# Altium PCB BEE-1012 PAY-IF V1.0.0.PcbDoc (part 1 of 3)
Units mm, origin at the board's own origin, x right, y up, seen from the top; angles counter-clockwise.
Board outline 93 x 90 mm, 8 copper layers (Top Layer, GND_Plane_2, Signal_3, Power_Plane, GND_Plane_5, Signal_6, GND_Plane_7, Bottom Layer), stack 1.672 mm thick; 514 components, 368 nets, 2268 pads, 326 vias.
Unrouted connection lines stored in the file: 1343.
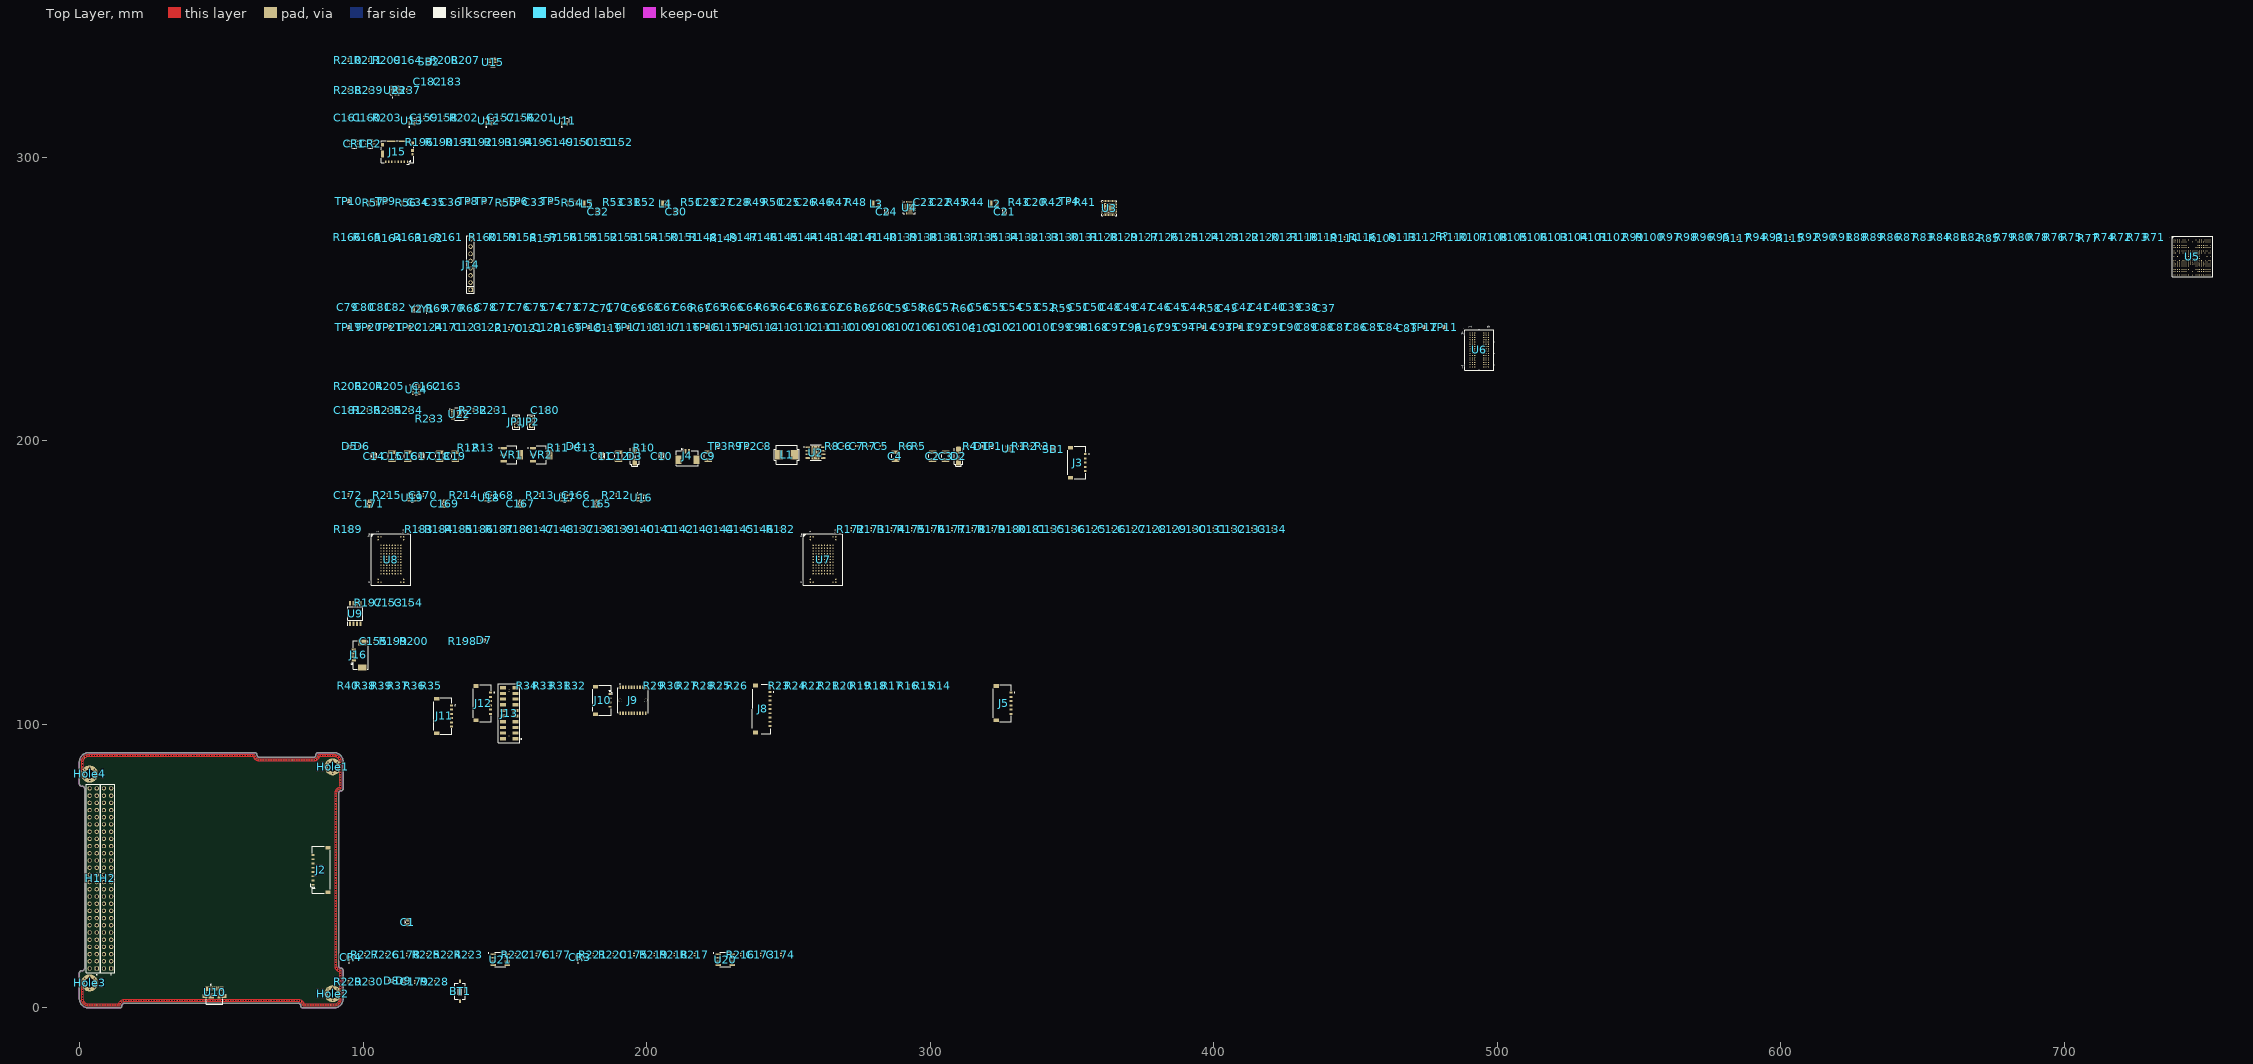
[diagram p0: Top Layer view]
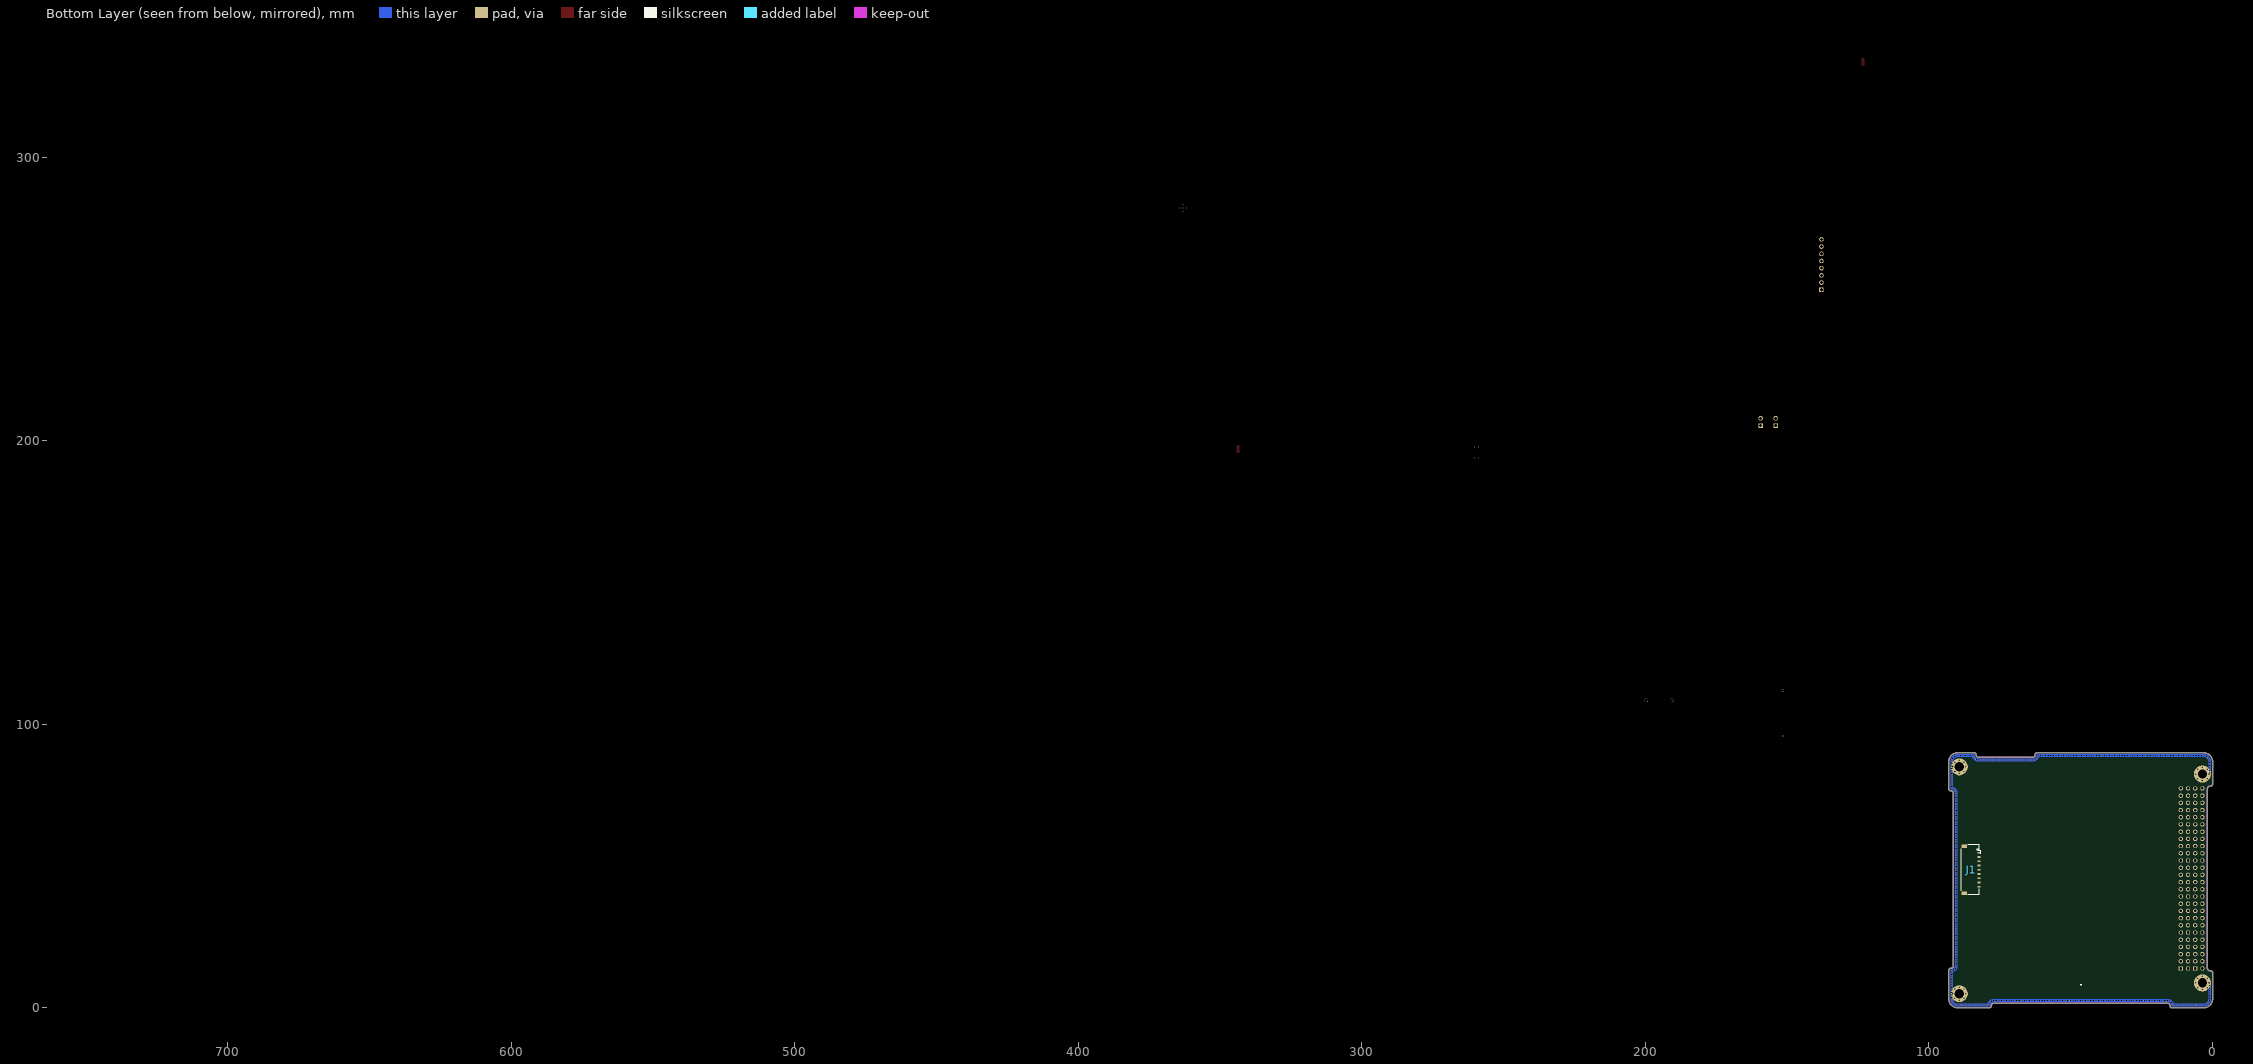
[diagram p1: Bottom Layer view, seen from below]
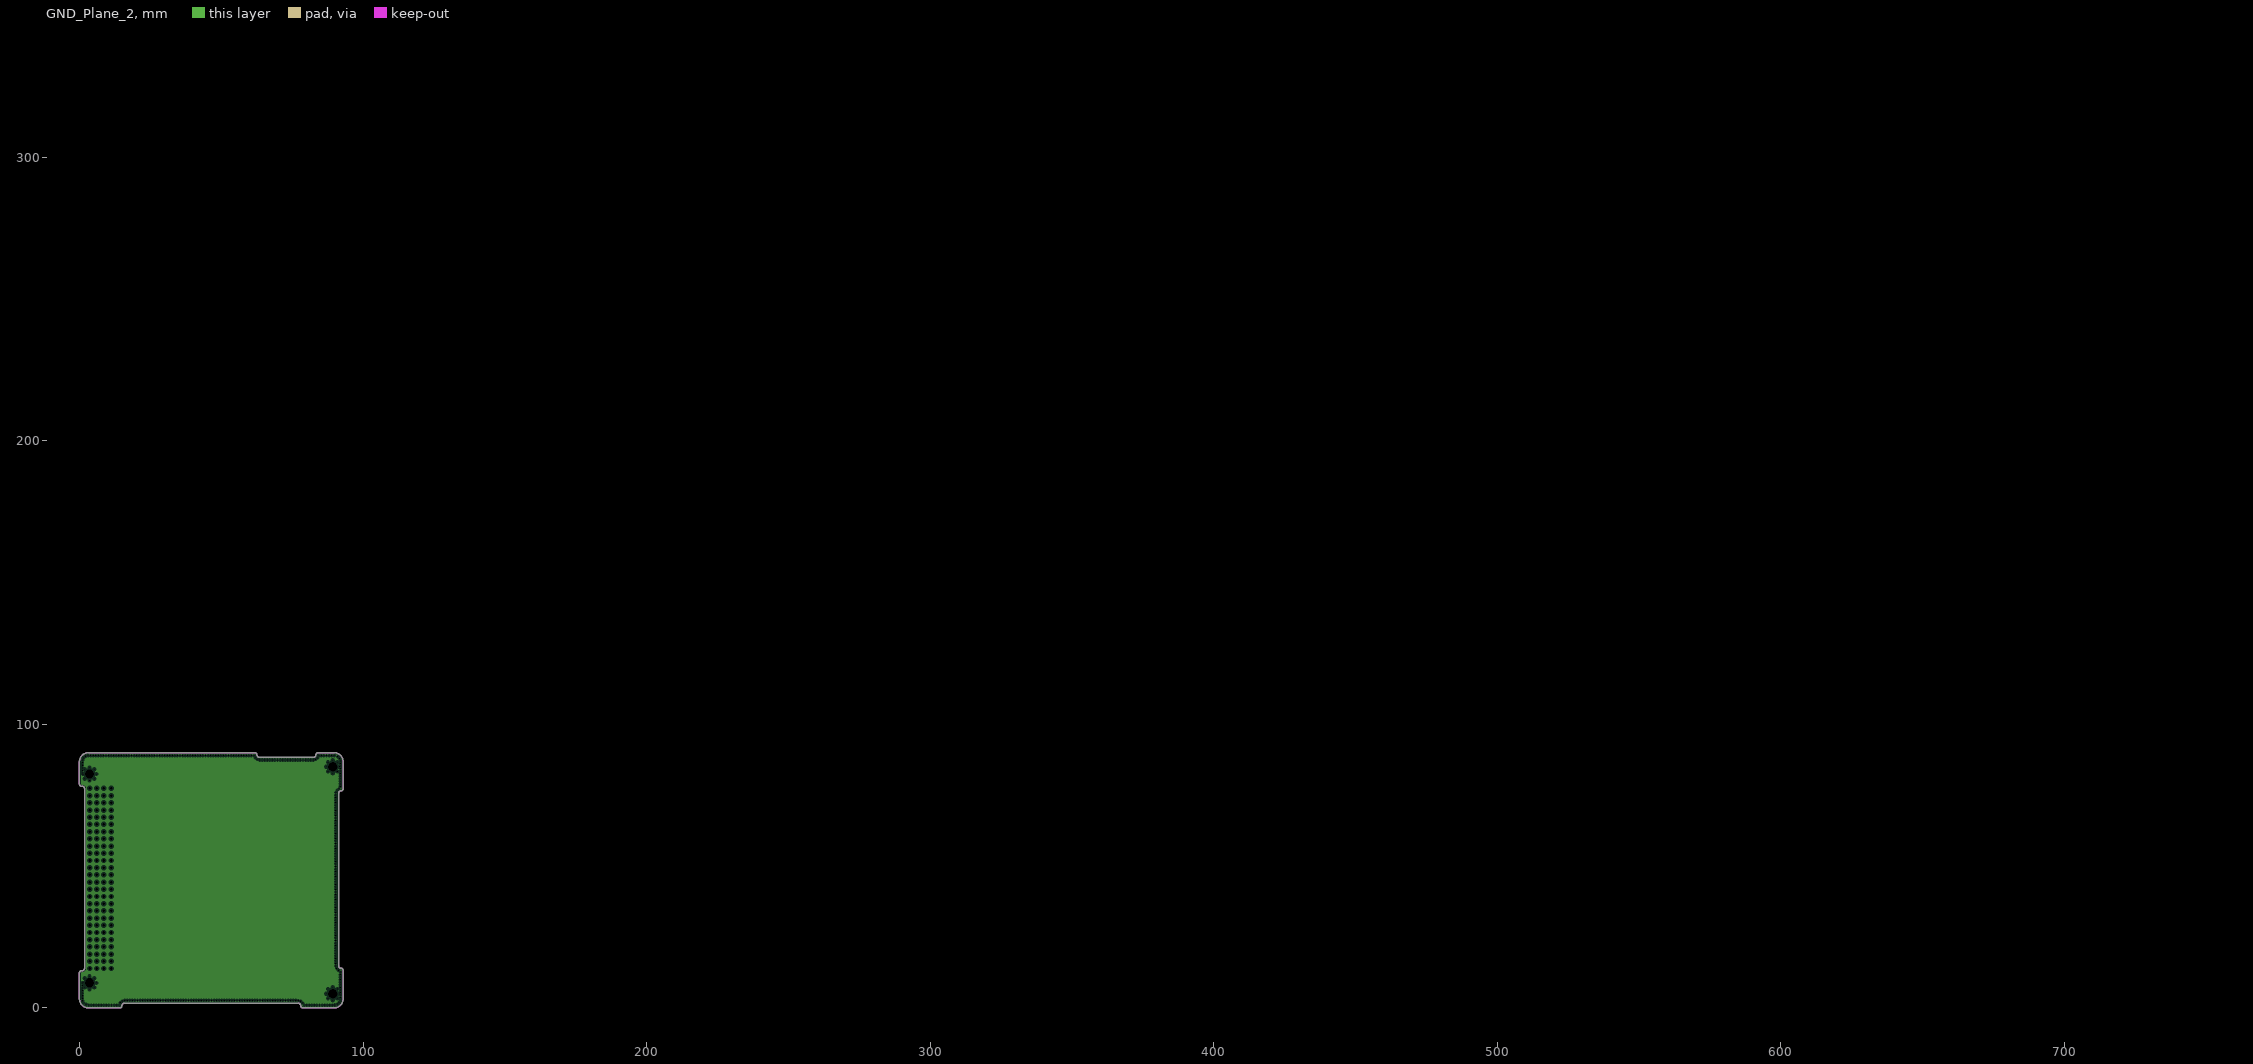
[diagram p2: GND_Plane_2, clearances drawn from the general rule]
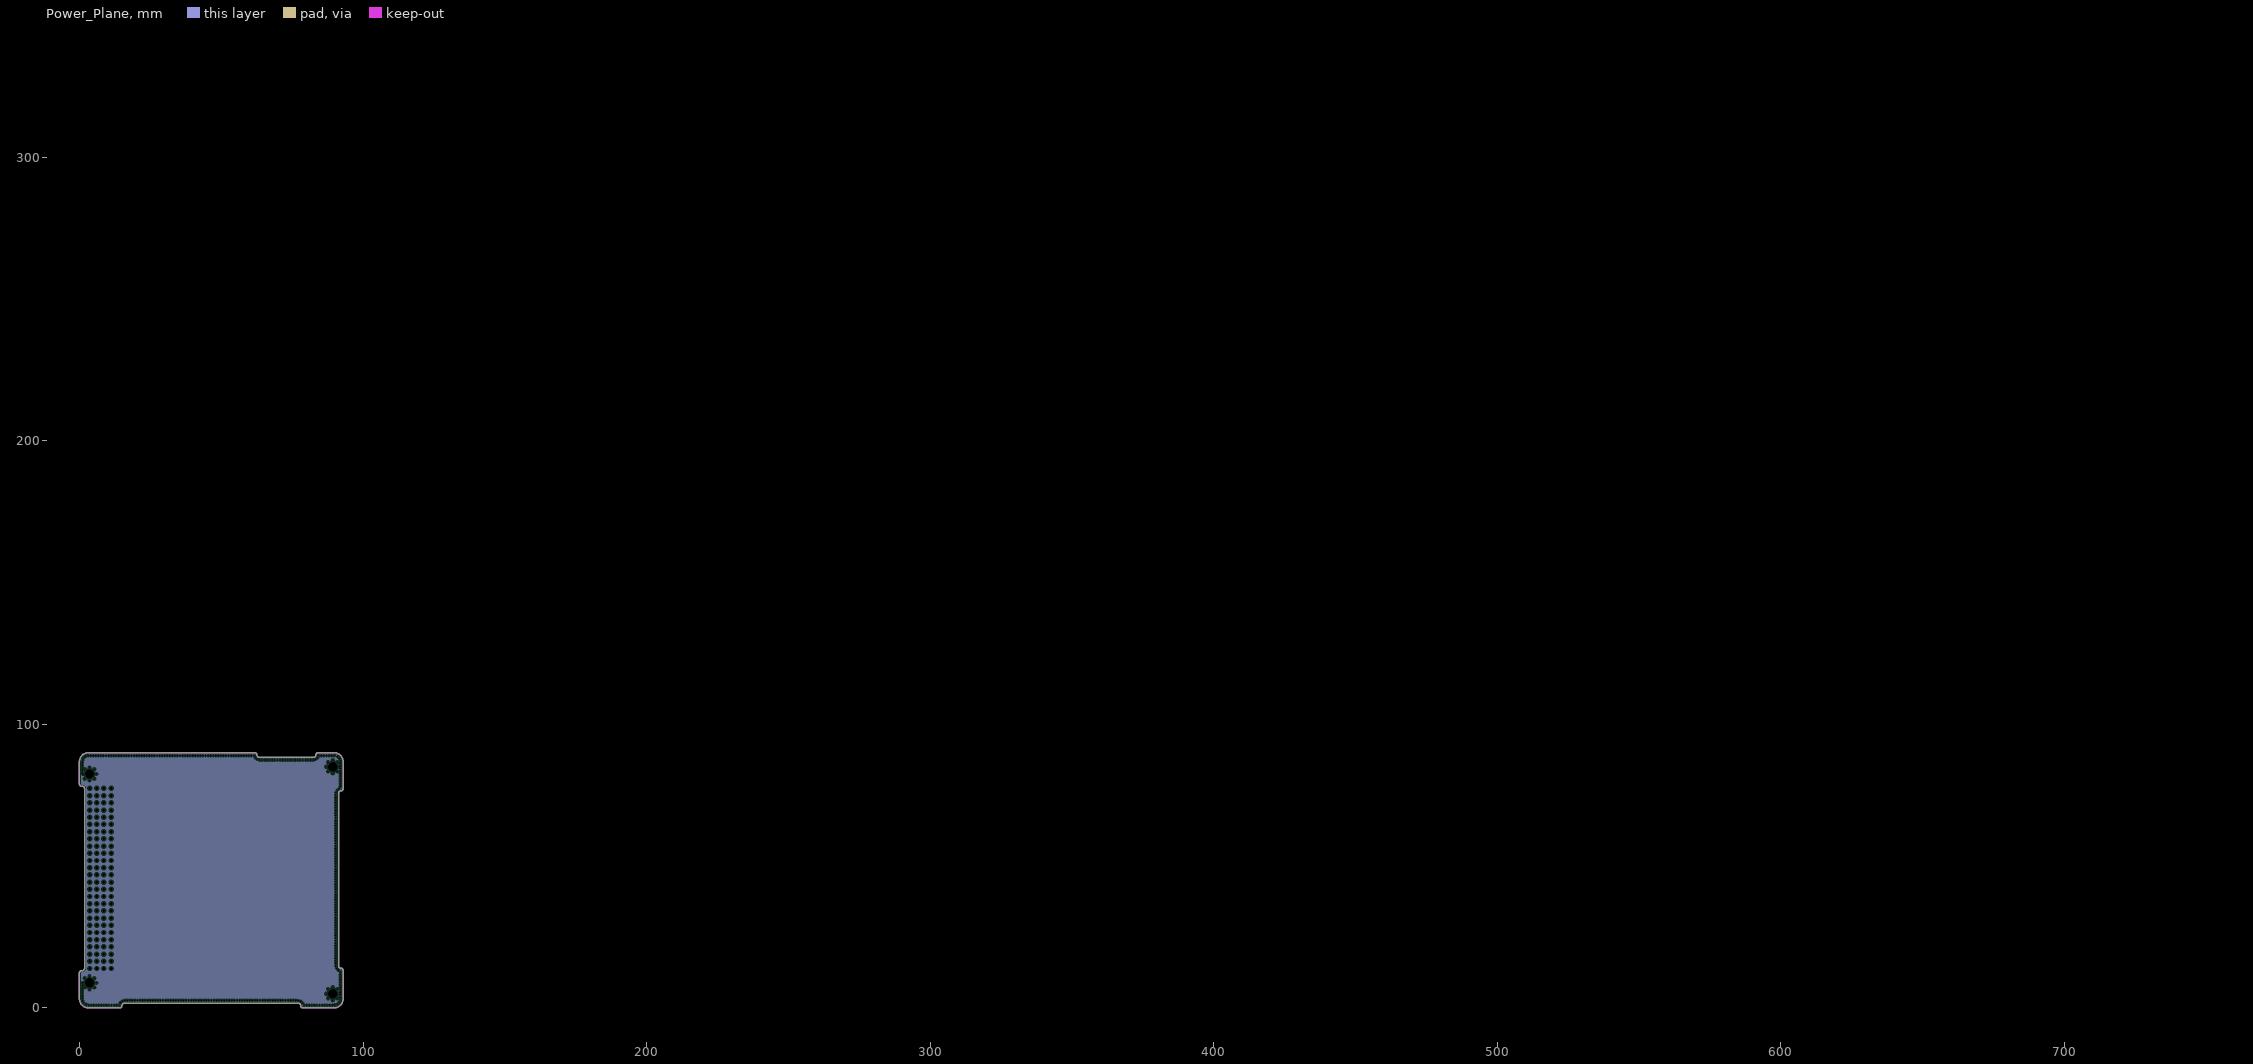
[diagram p3: Power_Plane, clearances drawn from the general rule]
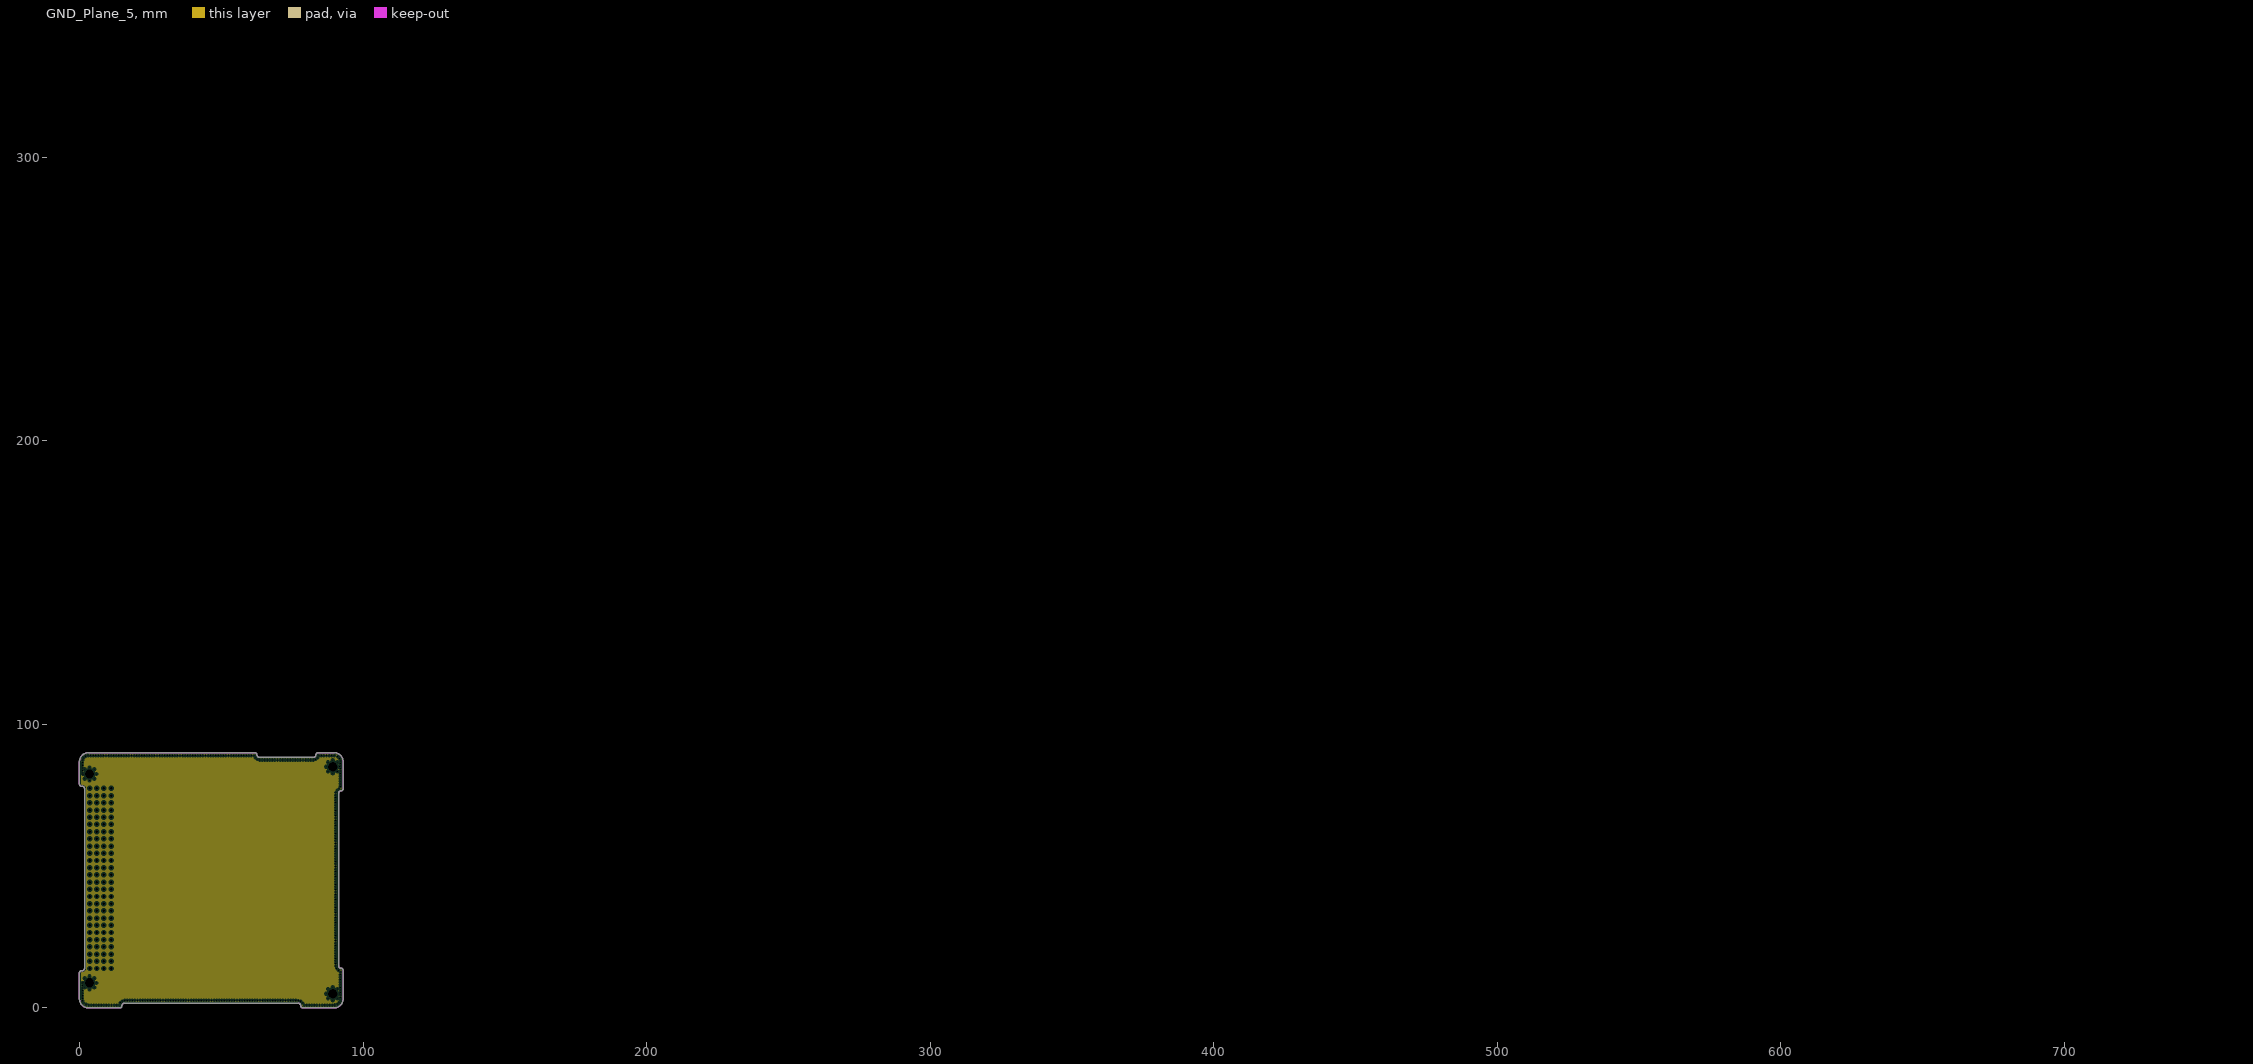
[diagram p4: GND_Plane_5, clearances drawn from the general rule]
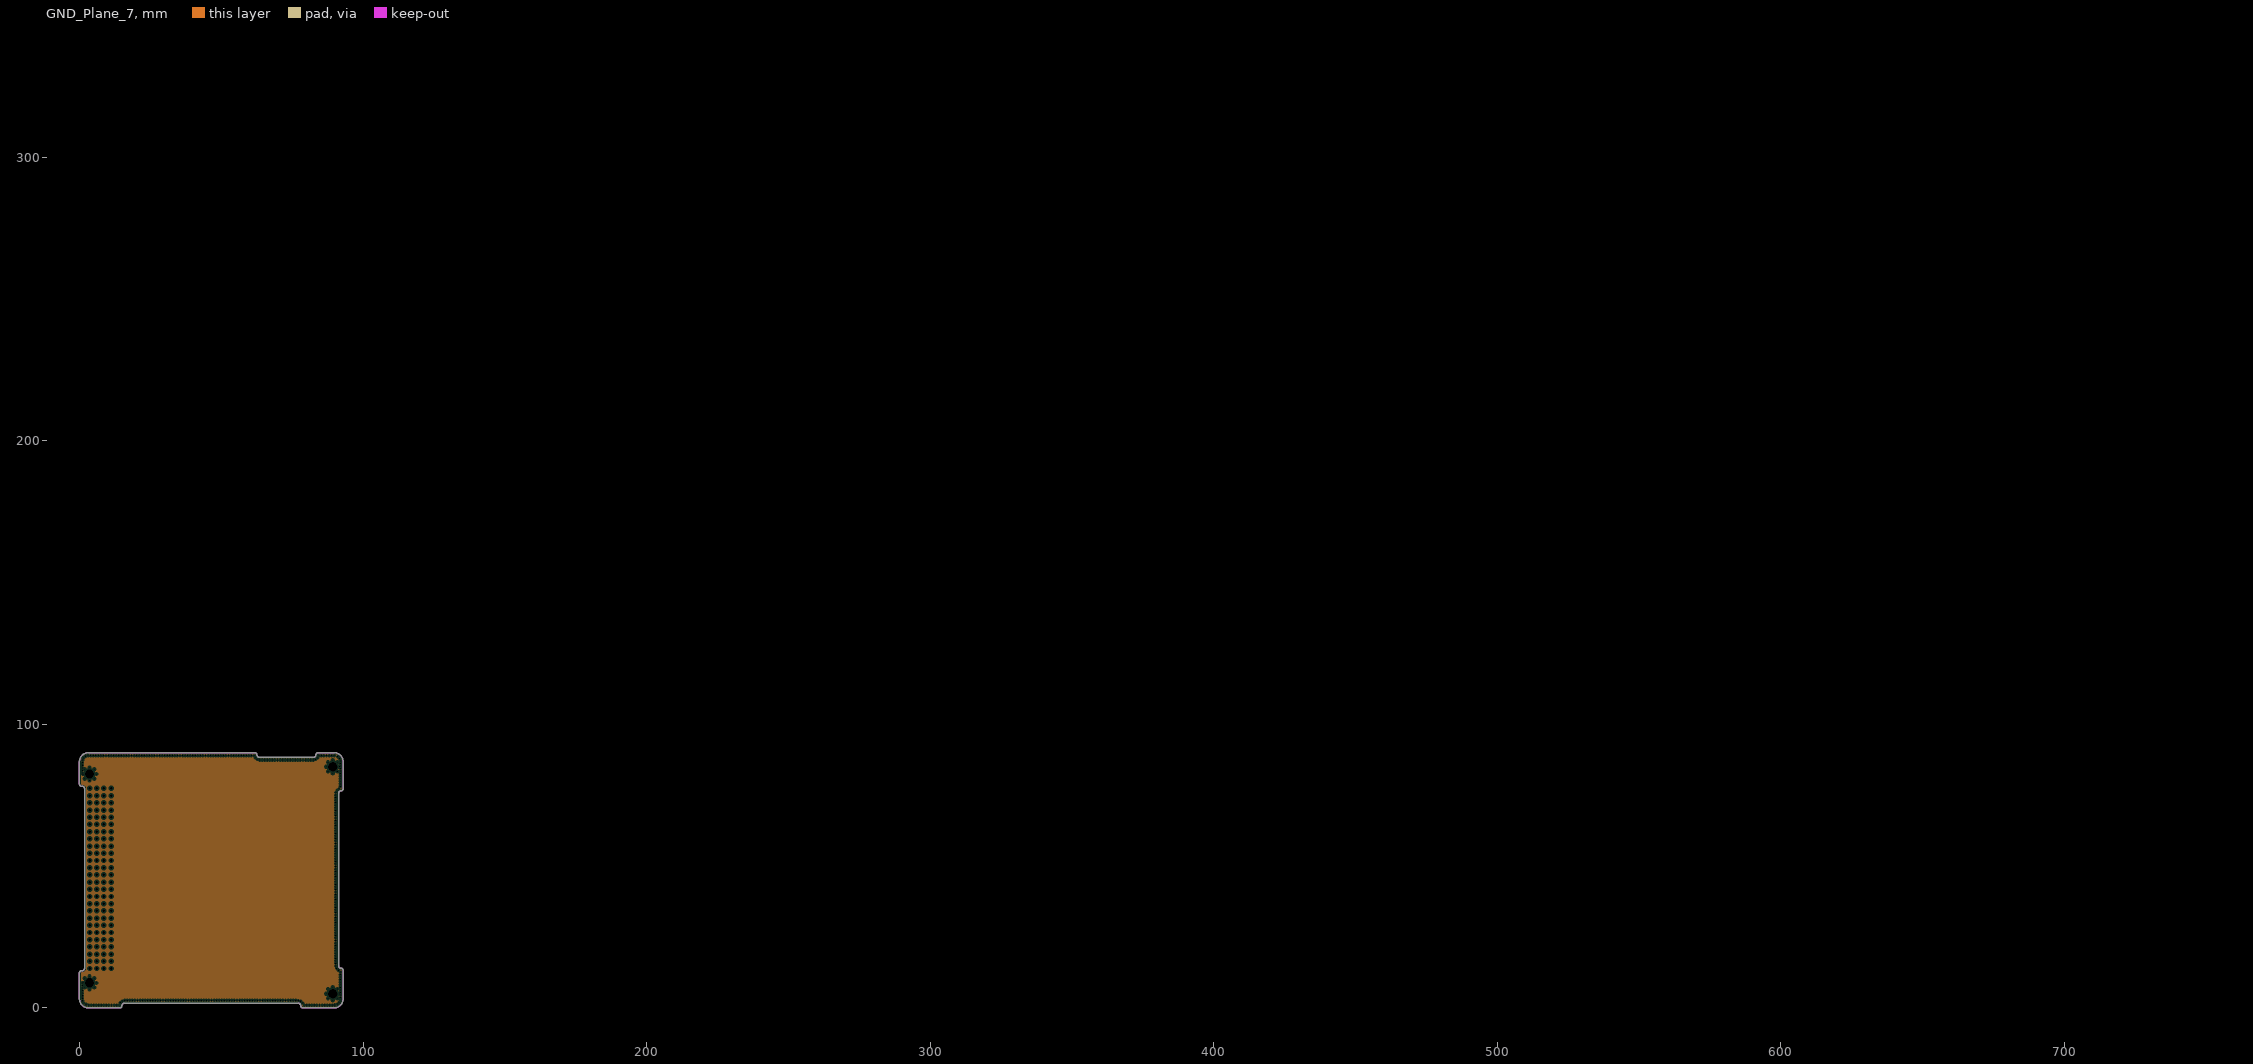
[diagram p5: GND_Plane_7, clearances drawn from the general rule]

## Layer stack, top to bottom
Top Solder: solder mask 0.012, Solder Resist, Dk 3.5
Top Layer: signal copper 0.04
Dielectric 2: prepreg 0.2, PP-006, Dk 4.1
GND_Plane_2: plane copper 0.032
Dielectric 4: prepreg 0.2, PP-006, Dk 4.1
Signal_3: signal copper 0.032
Dielectric 6: prepreg 0.2, PP-006, Dk 4.1
Power_Plane: plane copper 0.032
Dielectric 1: dielectric 0.2, FR-4, Dk 4.8
GND_Plane_5: plane copper 0.032
Dielectric 7: prepreg 0.2, PP-006, Dk 4.1
Signal_6: signal copper 0.032
Dielectric 5: prepreg 0.2, PP-006, Dk 4.1
GND_Plane_7: plane copper 0.032
Dielectric 3: prepreg 0.2, PP-006, Dk 4.1
Bottom Layer: signal copper 0.04
Bottom Solder: solder mask 0.012, Solder Resist, Dk 3.5

## Board outline
0,3.2 0,12.33 cw(c0.8,12.33) 0.8,13.13 1,13.13 ccw(c1,13.93) 1.8,13.93 1.8,77.35 ccw(c1,77.35) 1,78.15 0.8,78.15 cw(c0.8,78.95) 0,78.95 0,86.8 cw(c3.2,86.8) 3.193,90 3.2,90 61.8,90 cw(c61.8,89.2) 62.6,89.2 ccw(c63.4,89.2) 63.4,88.4 82.6,88.4 ccw(c82.6,89.2) 83.4,89.2 cw(c84.2,89.2) 84.2,90 89.8,90 89.807,90 cw(c89.8,86.8) 93,86.807 93,77.307 cw(c92.2,77.307) 92.2,76.507 ccw(c92.2,75.707) 91.4,75.707 91.4,14.8 ccw(c92.2,14.8) 92.2,14 cw(c92.2,13.2) 93,13.2 93,3.2 cw(c89.8,3.2) 89.8,0 78.8,0 cw(c78.8,0.8) 78,0.8 ccw(c77.2,0.8) 77.2,1.6 67.5,1.6 51,1.6 15.8,1.6 ccw(c15.8,0.8) 15,0.8 cw(c14.2,0.8) 14.2,0 3.2,0 cw(c3.2,3.2)

## Design rules (kind name [scope] priority, off if disabled: settings)
Clearance Clearance_BGA [WithinRoom('ROOM_SAMA7')] p1: gap=0.101 ignorepadtopadclearanceinfootprint=FALSE
Clearance Clearance_Diff90 [InNetClass('DIFF90')] p2: gap=0.127 ignorepadtopadclearanceinfootprint=FALSE
Clearance [All] p3: gap=0.127 ignorepadtopadclearanceinfootprint=FALSE
DiffPairsRouting DiffPairsRouting_Diff100 [All] p1: maxlimit=0.2 minlimit=0.127 mostfreqgap=0.2 toplayer_maxgap=0.127 toplayer_prefgap=0.127 toplayer_minwidth=0.177 toplayer_maxwidth=0.177 toplayer_prefwidth=0.177 midlayer1_mingap=0.2 midlayer1_minwidth=0.1 midlayer1_maxwidth=0.1 midlayer1_prefwidth=0.1 midlayer4_mingap=0.2 midlayer4_minwidth=0.1 midlayer4_maxwidth=0.1 midlayer4_prefwidth=0.1 bottomlayer_maxgap=0.127 bottomlayer_prefgap=0.127 bottomlayer_minwidth=0.177 bottomlayer_maxwidth=0.177 bottomlayer_prefwidth=0.177 impedanceprofiledriven=TRUE impedanceprofileid={A7C629CD-4A0D-4397-8A47-8BC4FB27C845} impedanceprofilevalue=100.000000 maxuncoupledlength=12.7
DiffPairsRouting DiffPairsRouting_Diff90 [All] p2: maxlimit=0.127 minlimit=0.127 mostfreqgap=0.127 toplayer_minwidth=0.24 toplayer_maxwidth=0.24 toplayer_prefwidth=0.24 midlayer1_minwidth=0.112 midlayer1_maxwidth=0.112 midlayer1_prefwidth=0.112 midlayer4_minwidth=0.112 midlayer4_maxwidth=0.112 midlayer4_prefwidth=0.112 bottomlayer_minwidth=0.24 bottomlayer_maxwidth=0.24 bottomlayer_prefwidth=0.24 impedanceprofiledriven=TRUE impedanceprofileid={21C5AD5F-6D0B-4350-B164-04A9B00691EE} impedanceprofilevalue=90.000000 maxuncoupledlength=12.7
MatchedLengths "Schematic Matched Net Lengths_5" [InNetClass('DDR-ADDR-CTL')] p1: tolerance=0.254 checknetsindiffpair=FALSE checkdiffpairvsdiffpair=TRUE checkxsignals=TRUE checkothers=TRUE
MatchedLengths "Schematic Matched Net Lengths_4" [InNetClass('DDR-LANE1')] p2: tolerance=0.254 checknetsindiffpair=FALSE checkdiffpairvsdiffpair=TRUE checkxsignals=TRUE checkothers=TRUE
MatchedLengths "Schematic Matched Net Lengths_3" [InNetClass('DDR-LANE0')] p3: tolerance=0.254 checknetsindiffpair=FALSE checkdiffpairvsdiffpair=TRUE checkxsignals=TRUE checkothers=TRUE
MatchedLengths "Schematic Matched Net Lengths_2" [InNetClass('DIFF90')] p4: tolerance=0.102 checknetsindiffpair=TRUE checkdiffpairvsdiffpair=FALSE checkxsignals=FALSE checkothers=FALSE
MatchedLengths "Schematic Matched Net Lengths_1" [InNetClass('DIFF100')] p5: tolerance=0.102 checknetsindiffpair=TRUE checkdiffpairvsdiffpair=FALSE checkxsignals=FALSE checkothers=FALSE
MatchedLengths "Schematic Matched Net Lengths" [InNetClass('JTAG')] p6: tolerance=2 checknetsindiffpair=FALSE checkdiffpairvsdiffpair=TRUE checkxsignals=TRUE checkothers=TRUE
PlaneClearance [All] p1: clearance=0.508
PlaneConnect [All] p1: planeconnectstyle=Relief reliefexpansion=0.508 reliefentries=4 reliefconductorwidth=0.254 reliefairgap=0.254
PolygonConnect [All] p1: connectstyle=Relief reliefconductorwidth=0.254 reliefentries=4 polygonreliefangle="90 Angle" airgapwidth=0.254
RoomDefinition ROOM_SAMA7 [False vs False] p1: confinementstyle=ConfineIn formatcopy=TRUE lockcomponents=FALSE outline 36.957,67.818 45.593,67.818 45.593,59.563 36.957,59.563
RoutingVias RoutingVias_BGA [WithinRoom('ROOM_SAMA7')] p1: holewidth=0.2 width=0.35 viastyle="Through Hole" minholewidth=0.2 minwidth=0.35 maxholewidth=0.2 maxwidth=0.35
RoutingVias [All] p2: holewidth=0.2 width=0.4 viastyle="Through Hole" minholewidth=0.2 minwidth=0.4 maxholewidth=0.5 maxwidth=1
SolderMaskExpansion [All] p1: expansion=0.102 istentingtop=FALSE
Width Width_Sing50 [InNetClass('DIFF90')] p1: maxlimit=0.364 minlimit=0.157 preferedwidth=0.364 toplayer_minwidth=0.364 midlayer1_maxwidth=0.157 midlayer1_prefwidth=0.157 midlayer4_maxwidth=0.157 midlayer4_prefwidth=0.157 bottomlayer_minwidth=0.364 impedanceprofiledriven=TRUE impedanceprofileid={9F8C7077-2CC5-4DDA-BF69-C97E8495018D} impedanceprofilevalue=50.000000 minimp=50.000000 maximp=50.000000 favimp=50.000000
Width [All] p2: maxlimit=1 minlimit=0.1 preferedwidth=0.254
27 further rules are at their usual default settings.

## Classes and differential pairs
differential pair class DIFF100: DDR_CK DDR_DQS0 DDR_DQS1
differential pair class DIFF90: EXP_USB LVDS_RXC LVDS_RXD LVDS_TXC LVDS_TXD RS_422_RX RS_422_TX SENSE1 SENSE2 SENSE3 SENSE4 USB_CONNECTOR USB_DEBUG USBA
net class QSPI: MRAM_QSPI_CLK MRAM_QSPI_CS MRAM_QSPI_D0 MRAM_QSPI_D1 MRAM_QSPI_D2 MRAM_QSPI_D3
net class JTAG: JTAG_NTRST_PC22 JTAG_TCK_PC23 JTAG_TDI_PC25 JTAG_TDO_PC26 JTAG_TMS_PC24
net class DIFF100: DDR_CK_N DDR_CK_P DDR_DQS0_N DDR_DQS0_P DDR_DQS1_N DDR_DQS1_P
net class DIFF90: EXP_USB_N EXP_USB_P USB_CONNECTOR_N USB_CONNECTOR_P USB_DEBUG_N USB_DEBUG_P USBA_N USBA_P
net class DDR-LANE1: DDR_D8 DDR_D9 DDR_D10 DDR_D11 DDR_D12 DDR_D13 DDR_D14 DDR_D15 DDR_DQM1 DDR_DQS1_N DDR_DQS1_P
net class DDR-LANE0: DDR_D0 DDR_D1 DDR_D2 DDR_D3 DDR_D4 DDR_D5 DDR_D6 DDR_D7 DDR_DQM0 DDR_DQS0_N DDR_DQS0_P
net class DDR-ADDR-CTL: DDR_A0 DDR_A1 DDR_A2 DDR_A3 DDR_A4 DDR_A5 DDR_A6 DDR_A7 DDR_A8 DDR_A9 DDR_A10 DDR_A11 DDR_A12 DDR_A13 DDR_A14 DDR_A15 DDR_BA0 DDR_BA1 DDR_BA2 DDR_CAS DDR_CK_N DDR_CK_P DDR_CKE DDR_CS DDR_ODT DDR_RAS DDR_WE
net class 50_eMMC2: SDMMC1_CLK SDMMC1_CMD SDMMC1_D0 SDMMC1_D1 SDMMC1_D2 SDMMC1_D3
net class 50_eMMC1: SDMMC0_CLK SDMMC0_CMD SDMMC0_D0 SDMMC0_D1 SDMMC0_D2 SDMMC0_D3 SDMMC0_D4 SDMMC0_D5 SDMMC0_D6 SDMMC0_D7
component class WATCHDOG: C164 R207 R208 R209 R210 R211 SB2 U15
component class USB_SWITCH: C182 C183 R237 R238 R239 U23
component class TEMP: C156 C157 C158 C159 C160 C161 R201 R202 R203 U11 U12 U13
component class SDCARD: C149 C150 C151 C152 CR1 CR2 J15 R190 R191 R192 R193 R194 R195 R196
component class SAMA7D65_PMIC: C20 C21 C22 C23 C24 C25 C26 C27 C28 C29 C30 C31 C32 C33 C34 C35 C36 L2 L3 L4 L5 R41 R42 R43 R44 R45 R46 R47 R48 R49 R50 R51 R52 R53 R54 R55 R56 R57 TP4 TP5 TP6 TP7 TP8 TP9 TP10 U3 U4
component class SAMA7D65_PIO: J14 R71 R72 R73 R74 R75 R76 R77 R78 R79 R80 R81 R82 R83 R84 R85 R86 R87 R88 R89 R90 R91 R92 R93 R94 R95 R96 R97 R98 R99 R100 R101 R102 R103 R104 R105 R106 R107 R108 R109 R110 R112 R113 R114 R115 R116 R117 R118 R119 R120 R121 R122 R123 R124 R125 R126 R127 R128 R129 R130 R131 R132 R133 R134 R135 R136 R137 R138 R139 R140 R141 R142 R143 R144 R145 R146 R147 R148 R149 R150 R151 R152 R153 R154 R155 R156 R157 R158 R159 R160 R161 R162 R163 R164 R165 R166 R? U5
component class SAMA7D65_MPU: C37 C38 C39 C40 C41 C42 C43 C44 C45 C46 C47 C48 C49 C50 C51 C52 C53 C54 C55 C56 C57 C58 C59 C60 C61 C62 C63 C64 C65 C66 C67 C68 C69 C70 C71 C72 C73 C74 C75 C76 C77 C78 C79 C80 C81 C82 R58 R59 R60 R61 R62 R63 R64 R65 R66 R67 R68 R69 R70 Y1 Y2
component class SAMA7D65_DDR3L: C83 C84 C85 C86 C87 C88 C89 C90 C91 C92 C93 C94 C95 C96 C97 C98 C99 C100 C101 C102 C103 C104 C105 C106 C107 C108 C109 C110 C111 C112 C113 C114 C115 C116 C117 C118 C119 C120 C121 C122 C123 C124 R167 R168 R169 R170 R171 TP11 TP12 TP13 TP14 TP15 TP16 TP17 TP18 TP19 TP20 TP21 TP22 U6
component class RTC: C162 C163 R204 R205 R206 U14
component class RS422: C180 C181 JP1 JP2 R231 R232 R233 R234 R235 R236 U22
component class POWER: C2 C3 C4 C5 C6 C7 C8 C9 C10 C11 C12 C13 C14 C15 C16 C17 C18 C19 D1 D2 D3 D4 D5 D6 J3 J4 L1 R1 R2 R3 R4 R5 R6 R7 R8 R9 R10 R11 R12 R13 SB1 TP1 TP2 TP3 U1 U2 VR1 VR2
component class MOUNTING_HOLE: Hole1 Hole2 Hole3 Hole4
component class LVDS: C165 C166 C167 C168 C169 C170 C171 C172 R212 R213 R214 R215 U16 U17 U18 U19
component class eMMC: C125 C126 C127 C128 C129 C130 C131 C132 C133 C134 C135 C136 C137 C138 C139 C140 C141 C142 C143 C144 C145 C146 C147 C148 R172 R173 R174 R175 R176 R177 R178 R179 R180 R181 R182 R183 R184 R185 R186 R187 R188 R189 U7 U8
component class EEPROM: C153 C154 R197 U9
component class DEBUG_CONSOLE: C155 D7 J16 R198 R199 R200 U10
component class CONNECTOR_INTERFACE: H1 H2 J5 J8 J9 J10 J11 J12 J13 R14 R15 R16 R17 R18 R19 R20 R21 R22 R23 R24 R25 R26 R27 R28 R29 R30 R31 R32 R33 R34 R35 R36 R37 R38 R39 R40
component class CONNECTOR_EXP: C1 J1 J2
component class CAN_PHY: C173 C174 C175 C176 C177 C178 CR3 CR4 R216 R217 R218 R219 R220 R221 R222 R223 R224 R225 R226 R227 U20 U21
component class BUTTON_LED: BT1 C179 D8 D9 R228 R229 R230
differential pair USBA: +USBA_P -USBA_N
differential pair USB_DEBUG: +USB_DEBUG_P -USB_DEBUG_N
differential pair USB_CONNECTOR: +USB_CONNECTOR_P -USB_CONNECTOR_N
differential pair SENSE4: +SENSE4_P -SENSE4_N
differential pair SENSE3: +SENSE3_P -SENSE3_N
differential pair SENSE2: +SENSE2_P -SENSE2_N
differential pair SENSE1: +SENSE1_P -SENSE1_N
differential pair RS_422_TX: +RS_422_TX_P -RS_422_TX_N
differential pair RS_422_RX: +RS_422_RX_P -RS_422_RX_N
differential pair LVDS_TXD: +LVDS_TXD_P -LVDS_TXD_N
differential pair LVDS_TXC: +LVDS_TXC_P -LVDS_TXC_N
differential pair LVDS_RXD: +LVDS_RXD_P -LVDS_RXD_N
differential pair LVDS_RXC: +LVDS_RXC_P -LVDS_RXC_N
differential pair EXP_USB: +EXP_USB_P -EXP_USB_N
differential pair DDR_DQS1: +DDR_DQS1_P -DDR_DQS1_N
differential pair DDR_DQS0: +DDR_DQS0_P -DDR_DQS0_N
differential pair DDR_CK: +DDR_CK_P -DDR_CK_N

## Components (designator, comment, footprint, x,y, rotation, side; value= is the part's Value field where it differs from the comment)
BT1 "BT_" SW2-SMD 134.239,5.842 r90 top value="SW chip 2 pin"
C1 "10uF/20V" CAP_C_2012X110 115.824,30.226 r90 top
C2 "47uF/25V" CAP_C_3225X80 300.863,194.564 r90 top
C3 "47uF/25V" CAP_C_3225X80 305.435,194.564 r90 top
C4 "47uF/25V" CAP_C_3225X80 287.782,194.564 r90 top
C5 "1uF/20V" CAP_C_1005X50_L 282.829,198.12 r0 top
C6 "2.2nF/10V" CAP_C_1005X50_L 269.875,198.12 r0 top
C7 "2.2nF/10V" CAP_C_1005X50_L 274.193,198.12 r0 top
C8 "0.1uF/10V" CAP_C_1005X50_L 241.554,198.12 r0 top
C9 "47uF/25V" CAP_C_3225X80 221.742,194.564 r90 top
C10 "10uF/20V" CAP_C_2012X110 205.359,194.564 r90 top
C11 "10uF/20V" CAP_C_2012X110 184.277,194.564 r90 top
C12 "47uF/25V" CAP_C_3225X80 190.119,194.564 r90 top
C13 "0.1uF/10V" CAP_C_1005X50_L 178.308,197.612 r90 top
C14 "10uF/20V" CAP_C_2012X110 103.886,194.564 r90 top
C15 "47uF/25V" CAP_C_3225X80 110.236,194.564 r90 top
C16 "47uF/25V" CAP_C_3225X80 115.824,194.564 r90 top
C17 "10uF/20V" CAP_C_2012X110 120.777,194.564 r90 top
C18 "47uF/25V" CAP_C_3225X80 127,194.564 r90 top
C19 "47uF/25V" CAP_C_3225X80 132.588,194.564 r90 top
C20 "4.7uF/10V" CAP_C_1005X50_L 337.185,284.099 r90 top
C21 "22uF/10V" CAP_C_1608X80 326.263,280.797 r90 top
C22 "1uF/20V" CAP_C_1005X50_L 303.784,284.099 r90 top
C23 "4.7uF/10V" CAP_C_1005X50_L 297.942,284.099 r90 top
C24 "22uF/10V" CAP_C_1608X80 284.734,280.797 r90 top
C25 "0.1uF/10V" CAP_C_1005X50_L 250.444,284.099 r90 top
C26 "4.7uF/10V" CAP_C_1005X50_L 256.286,284.099 r90 top
C27 "0.1uF/10V" CAP_C_1005X50_L 227.076,284.099 r90 top
C28 "4.7uF/10V" CAP_C_1005X50_L 232.918,284.099 r90 top
C29 "4.7uF/10V" CAP_C_1005X50_L 221.234,284.099 r90 top
C30 "22uF/10V" CAP_C_1608X80 210.439,280.797 r90 top
C31 "4.7uF/10V" CAP_C_1005X50_L 194.183,284.099 r90 top
C32 "22uF/10V" CAP_C_1608X80 182.88,280.797 r90 top
C33 "4.7uF/10V" CAP_C_1005X50_L 160.401,284.099 r90 top
C34 "4.7uF/10V" CAP_C_1005X50_L 119.507,284.099 r90 top
C35 "4.7uF/10V" CAP_C_1005X50_L 125.349,284.099 r90 top
C36 "4.7uF/10V" CAP_C_1005X50_L 131.191,284.099 r90 top
C37 "4.7uF/10V" CAP_C_1005X50_L 439.42,246.761 r90 top
C38 "0.1uF/10V" CAP_C_0603x30 433.324,247.142 r90 top
C39 "0.1uF/10V" CAP_C_0603x30 427.482,247.142 r90 top
C40 "0.1uF/10V" CAP_C_0603x30 421.64,247.142 r90 top
C41 "0.1uF/10V" CAP_C_0603x30 416.306,247.142 r90 top
C42 "0.1uF/10V" CAP_C_0603x30 410.464,247.142 r90 top
C43 "4.7uF/10V" CAP_C_1005X50_L 404.876,246.761 r90 top
C44 "0.1uF/10V" CAP_C_0603x30 392.938,247.142 r90 top
C45 "0.1uF/10V" CAP_C_0603x30 387.096,247.142 r90 top
C46 "0.1uF/10V" CAP_C_0603x30 381.254,247.142 r90 top
C47 "0.1uF/10V" CAP_C_0603x30 375.412,247.142 r90 top
C48 "18pF/10V" CAP_C_0603x30 363.728,247.142 r90 top
C49 "0.1uF/10V" CAP_C_0603x30 369.57,247.142 r90 top
C50 "0.1uF/10V" CAP_C_0603x30 357.886,247.142 r90 top
C51 "0.1uF/10V" CAP_C_0603x30 352.552,247.142 r90 top
C52 "0.1uF/10V" CAP_C_0603x30 340.741,247.142 r90 top
C53 "0.1uF/10V" CAP_C_0603x30 334.899,247.142 r90 top
C54 "0.1uF/10V" CAP_C_0603x30 329.057,247.142 r90 top
C55 "0.1uF/10V" CAP_C_0603x30 323.215,247.142 r90 top
C56 "0.1uF/10V" CAP_C_0603x30 317.373,247.142 r90 top
C57 "0.1uF/10V" CAP_C_0603x30 305.689,247.142 r90 top
C58 "0.1uF/10V" CAP_C_0603x30 294.513,247.142 r90 top
C59 "4.7uF/10V" CAP_C_1005X50_L 288.925,246.761 r90 top
C60 "0.1uF/10V" CAP_C_0603x30 282.829,247.142 r90 top
C61 "0.1uF/10V" CAP_C_0603x30 271.653,247.142 r90 top
C62 "0.1uF/10V" CAP_C_0603x30 265.811,247.142 r90 top
C63 "0.1uF/10V" CAP_C_0603x30 254.127,247.142 r90 top
C64 "0.1uF/10V" CAP_C_0603x30 236.601,247.142 r90 top
C65 "0.1uF/10V" CAP_C_0603x30 224.79,247.142 r90 top
C66 "0.1uF/10V" CAP_C_0603x30 213.106,247.142 r90 top
C67 "0.1uF/10V" CAP_C_0603x30 207.264,247.142 r90 top
C68 "0.1uF/10V" CAP_C_0603x30 201.422,247.142 r90 top
C69 "4.7uF/10V" CAP_C_1005X50_L 195.834,246.761 r90 top
C70 "0.1uF/10V" CAP_C_0603x30 189.738,247.142 r90 top
C71 "2.2uF/10V" CAP_C_1005X50_L 184.658,246.761 r90 top
C72 "0.1uF/10V" CAP_C_0603x30 178.562,247.142 r90 top
C73 "0.1uF/10V" CAP_C_0603x30 172.72,247.142 r90 top
C74 "0.1uF/10V" CAP_C_0603x30 166.878,247.142 r90 top
C75 "0.1uF/10V" CAP_C_0603x30 161.036,247.142 r90 top
C76 "0.1uF/10V" CAP_C_0603x30 155.194,247.142 r90 top
C77 "0.1uF/10V" CAP_C_0603x30 149.352,247.142 r90 top
C78 "0.1uF/10V" CAP_C_0603x30 143.51,247.142 r90 top
C79 "18pF/10V" CAP_C_0603x30 94.615,247.142 r90 top
C80 "18pF/10V" CAP_C_0603x30 100.457,247.142 r90 top
C81 "18pF/10V" CAP_C_0603x30 106.299,247.142 r90 top
C82 "18pF/10V" CAP_C_0603x30 111.633,247.142 r90 top
C83 "4.7uF/10V" CAP_C_1005X50_L 468.249,239.649 r90 top
C84 "0.1uF/10V" CAP_C_0603x30 462.153,240.03 r90 top
C85 "0.1uF/10V" CAP_C_0603x30 456.311,240.03 r90 top
C86 "0.1uF/10V" CAP_C_0603x30 450.469,240.03 r90 top
C87 "0.1uF/10V" CAP_C_0603x30 444.627,240.03 r90 top
C88 "0.1uF/10V" CAP_C_0603x30 438.785,240.03 r90 top
C89 "0.1uF/10V" CAP_C_0603x30 432.943,240.03 r90 top
C90 "0.1uF/10V" CAP_C_0603x30 427.101,240.03 r90 top
C91 "0.1uF/10V" CAP_C_0603x30 421.767,240.03 r90 top
C92 "0.1uF/10V" CAP_C_0603x30 415.925,240.03 r90 top
C93 "0.1uF/10V" CAP_C_0603x30 402.971,240.03 r90 top
C94 "0.1uF/10V" CAP_C_0603x30 390.017,240.03 r90 top
C95 "0.1uF/10V" CAP_C_0603x30 384.048,240.03 r90 top
C96 "0.1uF/10V" CAP_C_0603x30 371.094,240.03 r90 top
C97 "0.1uF/10V" CAP_C_0603x30 365.252,240.03 r90 top
C98 "0.1uF/10V" CAP_C_0603x30 352.298,240.03 r90 top
C99 "0.1uF/10V" CAP_C_0603x30 346.456,240.03 r90 top
C100 "0.1uF/10V" CAP_C_0603x30 332.74,240.03 r90 top
C101 "0.1uF/10V" CAP_C_0603x30 339.852,240.03 r90 top
C102 "0.1uF/10V" CAP_C_0603x30 325.628,240.03 r90 top
C103 "4.7uF/10V" CAP_C_1005X50_L 318.77,239.649 r90 top
C104 "0.1uF/10V" CAP_C_0603x30 311.404,240.03 r90 top
C105 "0.1uF/10V" CAP_C_0603x30 304.292,240.03 r90 top
C106 "0.1uF/10V" CAP_C_0603x30 297.18,240.03 r90 top
C107 "0.1uF/10V" CAP_C_0603x30 290.068,240.03 r90 top
C108 "0.1uF/10V" CAP_C_0603x30 282.956,240.03 r90 top
C109 "0.1uF/10V" CAP_C_0603x30 275.844,240.03 r90 top
C110 "0.1uF/10V" CAP_C_0603x30 268.986,240.03 r90 top
C111 "0.1uF/10V" CAP_C_0603x30 262.636,240.03 r90 top
C112 "0.1uF/10V" CAP_C_0603x30 255.778,240.03 r90 top
C113 "0.1uF/10V" CAP_C_0603x30 248.793,240.03 r90 top
C114 "0.1uF/10V" CAP_C_0603x30 241.935,240.03 r90 top
C115 "0.1uF/10V" CAP_C_0603x30 227.965,240.03 r90 top
C116 "0.1uF/10V" CAP_C_0603x30 213.995,240.03 r90 top
C117 "0.1uF/10V" CAP_C_0603x30 207.137,240.03 r90 top
C118 "0.1uF/10V" CAP_C_0603x30 200.279,240.03 r90 top
C119 "4.7uF/10V" CAP_C_1005X50_L 186.563,239.649 r90 top
C120 "0.1uF/10V" CAP_C_0603x30 164.973,240.03 r90 top
C121 "4.7uF/10V" CAP_C_1005X50_L 158.623,239.649 r90 top
C122 "0.1uF/10V" CAP_C_0603x30 144.145,240.03 r90 top
C123 "0.1uF/10V" CAP_C_0603x30 137.033,240.03 r90 top
C124 "0.1uF/10V" CAP_C_0603x30 123.317,240.03 r90 top
C125 "4.7uF/10V" CAP_C_1005X50_L 357.124,168.783 r90 top
C126 "4.7uF/10V" CAP_C_1005X50_L 364.236,168.783 r90 top
C127 "0.1uF/10V" CAP_C_1005X50_L 371.348,168.783 r90 top
C128 "0.1uF/10V" CAP_C_1005X50_L 378.46,168.783 r90 top
C129 "0.1uF/10V" CAP_C_1005X50_L 385.572,168.783 r90 top
C130 "0.1uF/10V" CAP_C_1005X50_L 392.684,168.783 r90 top
C131 "0.1uF/10V" CAP_C_1005X50_L 399.796,168.783 r90 top
C132 "0.1uF/10V" CAP_C_1005X50_L 406.4,168.783 r90 top
C133 "0.1uF/10V" CAP_C_1005X50_L 413.512,168.783 r90 top
C134 "0.1uF/10V" CAP_C_1005X50_L 420.624,168.783 r90 top
C135 "1uF/20V" CAP_C_1005X50_L 342.773,168.783 r90 top
C136 "0.1uF/10V" CAP_C_1005X50_L 350.012,168.783 r90 top
C137 "4.7uF/10V" CAP_C_1005X50_L 176.657,168.783 r90 top
C138 "4.7uF/10V" CAP_C_1005X50_L 183.769,168.783 r90 top
C139 "0.1uF/10V" CAP_C_1005X50_L 190.881,168.783 r90 top
C140 "0.1uF/10V" CAP_C_1005X50_L 197.993,168.783 r90 top
C141 "0.1uF/10V" CAP_C_1005X50_L 205.105,168.783 r90 top
C142 "0.1uF/10V" CAP_C_1005X50_L 211.709,168.783 r90 top
C143 "0.1uF/10V" CAP_C_1005X50_L 218.821,168.783 r90 top
C144 "0.1uF/10V" CAP_C_1005X50_L 225.933,168.783 r90 top
C145 "0.1uF/10V" CAP_C_1005X50_L 233.045,168.783 r90 top
C146 "0.1uF/10V" CAP_C_1005X50_L 240.157,168.783 r90 top
C147 "1uF/20V" CAP_C_1005X50_L 162.433,168.783 r90 top
C148 "0.1uF/10V" CAP_C_1005X50_L 169.545,168.783 r90 top
C149 "0.1uF/10V" CAP_C_1005X50_L 169.418,305.308 r90 top
C150 "0.1uF/10V" CAP_C_1005X50_L 176.53,305.308 r90 top
C151 "1uF/20V" CAP_C_1005X50_L 183.642,305.308 r90 top
C152 "1uF/20V" CAP_C_1005X50_L 190.246,305.308 r90 top
C153 "0.1uF/10V" CAP_C_1005X50_L 109.093,142.875 r90 top
C154 "0.1uF/10V" CAP_C_1005X50_L 116.205,142.875 r90 top
C155 "0.1uF/10V" CAP_C_1005X50_L 103.759,129.286 r90 top
C156 "1uF/20V" CAP_C_1005X50_L 155.829,313.944 r90 top
C157 "1uF/20V" CAP_C_1005X50_L 148.717,313.944 r90 top
C158 "1uF/20V" CAP_C_1005X50_L 128.651,313.944 r90 top
C159 "1uF/20V" CAP_C_1005X50_L 121.539,313.944 r90 top
C160 "1uF/20V" CAP_C_1005X50_L 101.473,313.944 r90 top
C161 "1uF/20V" CAP_C_1005X50_L 94.869,313.944 r90 top
C162 "0.1uF/10V" CAP_C_1005X50_L 122.555,219.202 r90 top
C163 "0.1uF/10V" CAP_C_1005X50_L 129.667,219.202 r90 top
C164 "1uF/20V" CAP_C_1005X50_L 115.951,334.264 r90 top
C165 "10uF/20V" CAP_C_2012X110 182.626,177.8 r90 top
C166 "1uF/20V" CAP_C_1005X50_L 175.133,180.848 r90 top
C167 "10uF/20V" CAP_C_2012X110 155.702,177.8 r90 top
C168 "1uF/20V" CAP_C_1005X50_L 148.209,180.848 r90 top
C169 "10uF/20V" CAP_C_2012X110 128.778,177.8 r90 top
C170 "1uF/20V" CAP_C_1005X50_L 121.285,180.848 r90 top
C171 "10uF/20V" CAP_C_2012X110 102.362,177.8 r90 top
C172 "1uF/20V" CAP_C_1005X50_L 94.869,180.848 r90 top
C173 "0.1uF/10V" CAP_C_1005X50_L 240.284,18.796 r90 top
C174 "0.1uF/10V" CAP_C_1005X50_L 247.396,18.796 r90 top
C175 "0.1uF/10V" CAP_C_1005X50_L 195.58,18.796 r90 top
C176 "0.1uF/10V" CAP_C_1005X50_L 161.163,18.796 r90 top
C177 "0.1uF/10V" CAP_C_1005X50_L 168.275,18.796 r90 top
C178 "0.1uF/10V" CAP_C_1005X50_L 115.443,18.796 r90 top
C179 "2.2uF/10V" CAP_C_1005X50_L 118.237,9.144 r90 top
C180 "0.1uF/10V" CAP_C_1005X50_L 164.338,210.82 r90 top
C181 "0.1uF/10V" CAP_C_1005X50_L 94.869,210.82 r90 top
C182 "4.7uF/10V" CAP_C_1005X50_L 122.809,326.644 r90 top
C183 "0.1uF/10V" CAP_C_1005X50_L 129.921,326.644 r90 top
CR1 "IP4220CZ6,125" DIODE_SOT457_1P7X3P1_NEX 96.901,304.673 r0 top
CR2 "IP4220CZ6,125" DIODE_SOT457_1P7X3P1_NEX 102.489,304.673 r0 top
CR3 "ESDCAN02-2BWY" SOT323-3L_STM 176.403,17.907 r0 top
CR4 "ESDCAN02-2BWY" SOT323-3L_STM 95.758,17.907 r0 top
D1 "LTST-C281KRKT" LED_0402 318.389,197.993 r0 top
D2 "SS54" DO-214AC_SMA 310.007,194.564 r90 top value=SS34
D3 "SS54" DO-214AC_SMA 195.834,194.564 r90 top value=SS34
D4 "LTST-C281KSKT" LED_0402 174.498,197.993 r0 top
D5 "LTST-C281KGKT" LED_0402 95.377,197.993 r0 top
D6 "LTST-C281KGKT" LED_0402 99.695,197.993 r0 top
D7 "LTST-C281TBKT" LED_0402 142.748,129.667 r0 top
D8 "LTST-C281TBKT" LED_0402 110.109,9.525 r0 top
D9 "LTST-C281KGKT" LED_0402 114.427,9.525 r0 top
H1 "ESQ-126-14-G-D" SAMTEC_ESQ-126-14-G-D 6.11,13.88 r90 top locked
H2 "ESQ-126-14-G-D" SAMTEC_ESQ-126-14-G-D 11.19,13.88 r90 top locked
Hole1 "hole_space" HOLE_SPACE 89.3,85 r90 top locked
Hole2 "hole_space" HOLE_SPACE 89.3,5 r90 top locked
Hole3 "hole_space" HOLE_SPACE 3.57,8.8 r0 top locked
Hole4 "hole_space" HOLE_SPACE 3.57,82.46 r0 top locked
J1 "5040500991" MOLEX_5040500991 85.465,48.697 r90 bottom
J2 "5040500891" MOLEX_5040500891 85.294,48.69 r270 top
J3 "5040500591" 5040500591 351.663,192.278 r90 top
J4 "0532610271" MOLEX_0532610271 214.376,193.802 r0 top
J5 "5040500691" 5040500691 325.501,107.442 r90 top
J8 "5040500991" 5040500991 240.538,105.41 r90 top
J9 "FSI-110-03-G-D-AD" SAMTEC_FSI-110-03-X-D-AD-TR 195.199,108.458 r0 top
J10 "HEADER 4x1" MOLEX_5040500491 184.277,108.458 r90 top
J11 "5040500691" 5040500691 128.194,102.946 r90 top
J12 "5040500691" 5040500691 141.986,107.442 r90 top
J13 "TLE-110-01-G-DV-A-TR" SAMTEC-TLE-110-01-X-DV-A 151.511,103.886 r90 top
J14 "Header 8x1" Header_254P_8x1 137.922,262.128 r90 top
J15 "Molex_1051620001" MOLEX_1051620001 112.141,301.879 r0 top
J16 "0532610471" MOLEX_0532610471 99.187,124.46 r90 top
JP1 "JUMPER_254P_NOPLACE" JUMPER_254P_2X1_NOPLACE 154.051,206.629 r90 top
JP2 "JUMPER_254P_NOPLACE" JUMPER_254P_2X1_NOPLACE 159.385,206.629 r90 top
L1 "SRP7050TA-220M" SRP7050TA-220M 249.428,195.072 r0 top
L2 "1.5uH 3.5A" IND_C_1008 322.58,283.591 r0 top
L3 "1.5uH 3.5A" IND_C_1008 280.924,283.591 r0 top
L4 "1.5uH 3.5A" IND_C_1008 206.629,283.591 r0 top
L5 "1.5uH 3.5A" IND_C_1008 179.07,283.591 r0 top
R1 "47k" RES_C_1005x30_L 331.47,198.12 r0 top
R2 "47k" RES_C_1005x30_L 335.28,198.12 r0 top
R3 "4.7k" RES_C_1005x30_L 339.598,198.12 r0 top
R4 "470k" RES_C_1005x30_L 314.071,198.12 r0 top
R5 "1k" RES_C_1005x30_L 295.91,198.12 r0 top
R6 "47k" RES_C_1005x30_L 291.592,198.12 r0 top
R7 "10k" RES_C_1005x30_L 278.511,198.12 r0 top
R8 "1k" RES_C_1005x30_L 265.557,198.12 r0 top
R9 "1k" RES_C_1005x30_L 231.394,198.12 r0 top
R10 "10k" RES_C_1005x30_L 199.263,197.612 r90 top
R11 "3.24k" RES_C_1005x30_L 168.91,197.612 r90 top
R12 "1k" RES_C_1005x30_L 137.033,197.612 r90 top
R13 "1k" RES_C_1005x30_L 142.621,197.612 r90 top
R14 "0R" RES_C_1005x30_L 303.53,113.538 r90 top
R15 "0R" RES_C_1005x30_L 297.942,113.538 r90 top
R16 "0R" RES_C_1005x30_L 292.354,113.538 r90 top
R17 "0R" RES_C_1005x30_L 286.639,113.538 r90 top
R18 "0R" RES_C_1005x30_L 281.051,113.538 r90 top
R19 "DNP/0R" RES_C_1005x30_L 275.463,113.538 r90 top
R20 "DNP/0R" RES_C_1005x30_L 269.621,113.538 r90 top
R21 "DNP/0R" RES_C_1005x30_L 264.287,113.538 r90 top
R22 "DNP/0R" RES_C_1005x30_L 258.445,113.538 r90 top
R23 "0R" RES_C_1005x30_L 246.761,113.538 r90 top
R24 "0R" RES_C_1005x30_L 252.603,113.538 r90 top
R25 "DNP/0R" RES_C_1005x30_L 226.06,113.538 r90 top
R26 "DNP/0R" RES_C_1005x30_L 231.902,113.538 r90 top
R27 "0R" RES_C_1005x30_L 214.376,113.538 r90 top
R28 "DNP/0R" RES_C_1005x30_L 220.218,113.538 r90 top
R29 "0R" RES_C_1005x30_L 202.692,113.538 r90 top
R30 "DNP/0R" RES_C_1005x30_L 208.534,113.538 r90 top
R31 "DNP/0R" RES_C_1005x30_L 169.545,113.538 r90 top
R32 "DNP/0R" RES_C_1005x30_L 174.879,113.538 r90 top
R33 "DNP/0R" RES_C_1005x30_L 163.703,113.538 r90 top
R34 "DNP/0R" RES_C_1005x30_L 157.861,113.538 r90 top
R35 "DNP/0R" RES_C_1005x30_L 124.079,113.538 r90 top
R36 "0R" RES_C_1005x30_L 118.237,113.538 r90 top
R37 "0R" RES_C_1005x30_L 112.395,113.538 r90 top
R38 "DNP/0R" RES_C_1005x30_L 100.711,113.538 r90 top
R39 "0R" RES_C_1005x30_L 106.553,113.538 r90 top
R40 "0R" RES_C_1005x30_L 94.869,113.538 r90 top
R41 "0R" RES_C_1005x30_L 354.711,284.099 r90 top
R42 "0R" RES_C_1005x30_L 343.027,284.099 r90 top
R43 "1k" RES_C_1005x30_L 331.343,284.099 r90 top
R44 "4.7k" RES_C_1005x30_L 315.468,284.099 r90 top
R45 "4.7k" RES_C_1005x30_L 309.626,284.099 r90 top
R46 "100k" RES_C_1005x30_L 262.128,284.099 r90 top
R47 "10k" RES_C_1005x30_L 267.97,284.099 r90 top
R48 "10k" RES_C_1005x30_L 273.939,284.099 r90 top
R49 "10k" RES_C_1005x30_L 238.76,284.099 r90 top
R50 "10k" RES_C_1005x30_L 244.602,284.099 r90 top
R51 "0R" RES_C_1005x30_L 215.9,284.099 r90 top
R52 "10k" RES_C_1005x30_L 199.517,284.099 r90 top
R53 "10k" RES_C_1005x30_L 188.341,284.099 r90 top
R54 "Shunt 4 Pin" RES_C_1206_SHUNT 173.863,283.845 r0 top value=0.047R
R55 "Shunt 4 Pin" RES_C_1206_SHUNT 150.495,283.845 r0 top value=0.047R
R56 "Shunt 4 Pin" RES_C_1206_SHUNT 115.316,283.845 r0 top value=0.047R
R57 "Shunt 4 Pin" RES_C_1206_SHUNT 103.632,283.845 r0 top value=0.047R
R58 "10k" RES_C_1005x30_L 399.034,246.761 r90 top
R59 "10k" RES_C_1005x30_L 346.837,246.761 r90 top
R60 "5.62k" RES_C_1005x30_L 311.785,246.761 r90 top
R61 "DNP/10k" RES_C_1005x30_L 300.609,246.761 r90 top
R62 "10k" RES_C_1005x30_L 277.241,246.761 r90 top
R63 "16.9k" RES_C_0603X30 259.969,247.142 r90 top
R64 "16.9k" RES_C_0603X30 248.285,247.142 r90 top
R65 "20k" RES_C_0603X30 242.443,247.142 r90 top
R66 "16.9k" RES_C_0603X30 230.759,247.142 r90 top
R67 "1k" RES_C_1005x30_L 219.202,246.761 r90 top
R68 "DNP/0R" RES_C_1005x30_L 137.795,246.761 r90 top
R69 "1M 1%" RES_C_1005x30_L 126.111,246.761 r90 top
R70 "1M 1%" RES_C_1005x30_L 131.953,246.761 r90 top
R71 "22R" RES_C_0603X30 731.774,271.78 r90 top
R72 "22R" RES_C_0603X30 720.09,271.78 r90 top
R73 "22R" RES_C_0603X30 725.932,271.78 r90 top
R74 "22R" RES_C_0603X30 714.248,271.78 r90 top
R75 "22R" RES_C_0603X30 702.564,271.78 r90 top
R76 "22R" RES_C_0603X30 696.595,271.78 r90 top
R77 "4.7k" RES_C_1005x30_L 708.533,271.399 r90 top
R78 "22R" RES_C_0603X30 690.753,271.78 r90 top
R79 "22R" RES_C_0603X30 679.069,271.78 r90 top
R80 "22R" RES_C_0603X30 684.911,271.78 r90 top
R81 "22R" RES_C_0603X30 662.051,271.78 r90 top
R82 "22R" RES_C_0603X30 667.385,271.78 r90 top
R83 "22R" RES_C_0603X30 650.367,271.78 r90 top
R84 "22R" RES_C_0603X30 656.209,271.78 r90 top
R85 "4.7k" RES_C_1005x30_L 673.481,271.399 r90 top
R86 "22R" RES_C_0603X30 638.683,271.78 r90 top
R87 "22R" RES_C_0603X30 644.525,271.78 r90 top
R88 "22R" RES_C_0603X30 626.999,271.78 r90 top
R89 "22R" RES_C_0603X30 632.841,271.78 r90 top
R90 "22R" RES_C_0603X30 615.823,271.78 r90 top
R91 "22R" RES_C_0603X30 621.665,271.78 r90 top
R92 "22R" RES_C_0603X30 609.981,271.78 r90 top
R93 "22R" RES_C_0603X30 597.281,271.78 r90 top
R94 "22R" RES_C_0603X30 591.439,271.78 r90 top
R95 "22R" RES_C_0603X30 578.612,271.78 r90 top
R96 "22R" RES_C_0603X30 572.77,271.78 r90 top
R97 "22R" RES_C_0603X30 561.086,271.78 r90 top
R98 "22R" RES_C_0603X30 566.928,271.78 r90 top
R99 "22R" RES_C_0603X30 548.132,271.78 r90 top
R100 "22R" RES_C_0603X30 553.974,271.78 r90 top
R101 "22R" RES_C_0603X30 534.416,271.78 r90 top
R102 "22R" RES_C_0603X30 541.02,271.78 r90 top
R103 "22R" RES_C_0603X30 520.192,271.78 r90 top
R104 "22R" RES_C_0603X30 527.304,271.78 r90 top
R105 "22R" RES_C_0603X30 505.968,271.78 r90 top
R106 "22R" RES_C_0603X30 513.08,271.78 r90 top
R107 "22R" RES_C_0603X30 491.744,271.78 r90 top
R108 "22R" RES_C_0603X30 498.856,271.78 r90 top
R109 "4.7k" RES_C_1005x30_L 459.867,271.399 r90 top
R110 "22R" RES_C_0603X30 484.886,271.78 r90 top
R112 "22R" RES_C_0603X30 473.71,271.78 r90 top
R113 "22R" RES_C_0603X30 466.852,271.78 r90 top
R114 "4.7k" RES_C_1005x30_L 446.151,271.399 r90 top
R115 "4.7k" RES_C_1005x30_L 603.25,271.399 r90 top
R116 "22R" RES_C_0603X30 452.755,271.78 r90 top
R117 "4.7k" RES_C_1005x30_L 584.708,271.399 r90 top
R118 "22R" RES_C_0603X30 432.181,271.78 r90 top
R119 "22R" RES_C_0603X30 439.039,271.78 r90 top
R120 "22R" RES_C_0603X30 418.465,271.78 r90 top
R121 "22R" RES_C_0603X30 425.577,271.78 r90 top
R122 "22R" RES_C_0603X30 411.353,271.78 r90 top
R123 "22R" RES_C_0603X30 404.241,271.78 r90 top
R124 "22R" RES_C_0603X30 397.129,271.78 r90 top
R125 "22R" RES_C_0603X30 390.017,271.78 r90 top
R126 "22R" RES_C_0603X30 382.905,271.78 r90 top
R127 "22R" RES_C_0603X30 375.793,271.78 r90 top
R128 "22R" RES_C_0603X30 361.569,271.78 r90 top
R129 "22R" RES_C_0603X30 368.681,271.78 r90 top
R130 "22R" RES_C_0603X30 347.853,271.78 r90 top
R131 "22R" RES_C_0603X30 354.965,271.78 r90 top
R132 "22R" RES_C_0603X30 333.629,271.78 r90 top
R133 "22R" RES_C_0603X30 340.741,271.78 r90 top
R134 "22R" RES_C_0603X30 326.517,271.78 r90 top
R135 "22R" RES_C_0603X30 319.405,271.78 r90 top
R136 "22R" RES_C_0603X30 305.054,271.78 r90 top
R137 "22R" RES_C_0603X30 312.166,271.78 r90 top
R138 "22R" RES_C_0603X30 297.942,271.78 r90 top
R139 "22R" RES_C_0603X30 290.83,271.78 r90 top
R140 "22R" RES_C_0603X30 283.718,271.78 r90 top
R141 "22R" RES_C_0603X30 277.114,271.78 r90 top
R142 "22R" RES_C_0603X30 270.002,271.78 r90 top
R143 "22R" RES_C_0603X30 262.89,271.78 r90 top
R144 "22R" RES_C_0603X30 255.778,271.78 r90 top
R145 "22R" RES_C_0603X30 248.666,271.78 r90 top
R146 "22R" RES_C_0603X30 241.554,271.78 r90 top
R147 "22R" RES_C_0603X30 234.442,271.78 r90 top
R148 "22R" RES_C_0603X30 220.218,271.78 r90 top
R149 "4.7k" RES_C_1005x30_L 227.457,271.399 r90 top
R150 "22R" RES_C_0603X30 206.502,271.78 r90 top
R151 "22R" RES_C_0603X30 213.614,271.78 r90 top
R152 "22R" RES_C_0603X30 185.166,271.78 r90 top
R153 "22R" RES_C_0603X30 192.278,271.78 r90 top
R154 "22R" RES_C_0603X30 199.39,271.78 r90 top
R155 "22R" RES_C_0603X30 178.054,271.78 r90 top
R156 "22R" RES_C_0603X30 170.815,271.78 r90 top
R157 "4.7k" RES_C_1005x30_L 163.957,271.399 r90 top
R158 "22R" RES_C_0603X30 156.591,271.78 r90 top
R159 "22R" RES_C_0603X30 149.479,271.78 r90 top
R160 "22R" RES_C_0603X30 142.367,271.78 r90 top
R161 "22R" RES_C_0603X30 130.175,271.78 r90 top
R162 "DNP/10k" RES_C_1005x30_L 123.317,271.399 r90 top
R163 "22R" RES_C_0603X30 115.951,271.78 r90 top
R164 "10k" RES_C_1005x30_L 109.093,271.399 r90 top
R165 "22R" RES_C_0603X30 101.727,271.78 r90 top
R166 "22R" RES_C_0603X30 94.615,271.78 r90 top
R167 "100k" RES_C_1005x30_L 377.19,239.649 r90 top
R168 "240R" RES_C_0603X30 358.14,240.03 r90 top
R169 "1k" RES_C_1005x30_L 172.339,239.649 r90 top
R170 "1k" RES_C_1005x30_L 151.511,239.649 r90 top
R171 "240R" RES_C_0603X30 130.429,240.03 r90 top
R172 "10k" RES_C_1005x30_L 272.161,168.783 r90 top
R173 "10k" RES_C_1005x30_L 279.273,168.783 r90 top
R174 "10k" RES_C_1005x30_L 286.385,168.783 r90 top
R175 "10k" RES_C_1005x30_L 293.497,168.783 r90 top
R176 "10k" RES_C_1005x30_L 300.609,168.783 r90 top
R177 "10k" RES_C_1005x30_L 307.721,168.783 r90 top
R178 "10k" RES_C_1005x30_L 314.833,168.783 r90 top
R179 "10k" RES_C_1005x30_L 321.945,168.783 r90 top
R180 "10k" RES_C_1005x30_L 329.057,168.783 r90 top
R181 "10k" RES_C_1005x30_L 336.169,168.783 r90 top
R182 "10k" RES_C_1005x30_L 247.269,168.783 r90 top
R183 "10k" RES_C_1005x30_L 119.761,168.783 r90 top
R184 "10k" RES_C_1005x30_L 126.873,168.783 r90 top
R185 "10k" RES_C_1005x30_L 133.985,168.783 r90 top
R186 "10k" RES_C_1005x30_L 141.097,168.783 r90 top
R187 "10k" RES_C_1005x30_L 148.209,168.783 r90 top
R188 "10k" RES_C_1005x30_L 155.321,168.783 r90 top
R189 "10k" RES_C_1005x30_L 94.869,168.783 r90 top
R190 "DNP/10k" RES_C_1005x30_L 127.127,305.308 r90 top
R191 "DNP/10k" RES_C_1005x30_L 134.239,305.308 r90 top
R192 "DNP/10k" RES_C_1005x30_L 140.843,305.308 r90 top
R193 "DNP/10k" RES_C_1005x30_L 147.955,305.308 r90 top
R194 "DNP/10k" RES_C_1005x30_L 155.067,305.308 r90 top
R195 "DNP/10k" RES_C_1005x30_L 162.179,305.308 r90 top
R196 "10k" RES_C_1005x30_L 120.015,305.308 r90 top
R197 "4.7k" RES_C_1005x30_L 101.981,142.875 r90 top
R198 "1k" RES_C_1005x30_L 135.128,129.286 r90 top
R199 "10k" RES_C_1005x30_L 110.871,129.286 r90 top
R200 "10k" RES_C_1005x30_L 118.11,129.286 r90 top
R201 "22R" RES_C_1005x30_L 162.941,313.944 r90 top
R202 "22R" RES_C_1005x30_L 135.763,313.944 r90 top
R203 "22R" RES_C_1005x30_L 108.585,313.944 r90 top
R204 "4.7k" RES_C_1005x30_L 102.235,219.202 r90 top
R205 "4.7k" RES_C_1005x30_L 109.601,219.202 r90 top
R206 "4.7k" RES_C_1005x30_L 94.869,219.202 r90 top
R207 "22R" RES_C_1005x30_L 136.271,334.264 r90 top
R208 "22R" RES_C_1005x30_L 128.905,334.264 r90 top
R209 "22R" RES_C_1005x30_L 108.585,334.264 r90 top
R210 "16.5k" RES_C_1005x30_L 94.869,334.264 r90 top
R211 "16.5k" RES_C_1005x30_L 101.981,334.264 r90 top
R212 "100R" RES_C_1005x30_L 189.357,180.848 r90 top
R213 "100R" RES_C_1005x30_L 162.433,180.848 r90 top
R214 "100R" RES_C_1005x30_L 135.509,180.848 r90 top
R215 "100R" RES_C_1005x30_L 108.585,180.848 r90 top
R216 "22R" RES_C_1005x30_L 233.172,18.796 r90 top
R217 "22R" RES_C_1005x30_L 216.916,18.796 r90 top
R218 "60R" RES_C_1005x30_L 209.804,18.796 r90 top
R219 "22R" RES_C_1005x30_L 202.692,18.796 r90 top
R220 "60R" RES_C_1005x30_L 188.214,18.796 r90 top
R221 "10k" RES_C_1005x30_L 181.229,18.796 r90 top
R222 "22R" RES_C_1005x30_L 153.797,18.796 r90 top
R223 "22R" RES_C_1005x30_L 137.287,18.796 r90 top
R224 "60R" RES_C_1005x30_L 129.921,18.796 r90 top
R225 "22R" RES_C_1005x30_L 122.555,18.796 r90 top
R226 "60R" RES_C_1005x30_L 108.077,18.796 r90 top
R227 "10k" RES_C_1005x30_L 100.711,18.796 r90 top
R228 "100R" RES_C_1005x30_L 125.349,9.144 r90 top
R229 "1k" RES_C_1005x30_L 94.869,9.144 r90 top
R230 "1k" RES_C_1005x30_L 102.235,9.144 r90 top
R231 "4.7k" RES_C_1005x30_L 146.304,210.82 r90 top
R232 "4.7k" RES_C_1005x30_L 138.938,210.82 r90 top
R233 "DNP/4.7k" RES_C_1005X40 123.571,207.772 r90 top
R234 "DNP/120R" RES_C_1005x30_L 116.205,210.82 r90 top
R235 "DNP/120R" RES_C_1005x30_L 108.839,210.82 r90 top
R236 "4.7k" RES_C_1005x30_L 101.473,210.82 r90 top
R237 "10k" RES_C_1005X40 115.443,323.596 r90 top
R238 "1k" RES_C_1005X40 94.869,323.596 r90 top
R239 "1k" RES_C_1005X40 102.235,323.596 r90 top
R? "22R" RES_C_0603X30 480.822,272.034 r0 top
SB1 "JUMPER" JUMPER_1608 343.662,196.977 r90 top
SB2 "JUMPER" JUMPER_1608 123.317,333.629 r90 top
TP1 "" "Test point" 321.818,197.993 r90 top
TP2 "" "Test point" 235.458,197.993 r90 top
TP3 "" "Test point" 225.298,197.993 r90 top
TP4 "" "Test point" 348.996,284.48 r90 top
TP5 "" "Test point" 166.37,284.48 r90 top
TP6 "" "Test point" 154.686,284.48 r90 top
TP7 "" "Test point" 143.002,284.48 r90 top
TP8 "" "Test point" 137.16,284.48 r90 top
TP9 "" "Test point" 107.95,284.48 r90 top
TP10 "" "Test point" 94.996,284.48 r90 top
TP11 "" "Test point" 481.33,240.03 r90 top
TP12 "" "Test point" 474.218,240.03 r90 top
TP13 "" "Test point" 409.194,240.03 r90 top
TP14 "" "Test point" 396.24,240.03 r90 top
TP15 "" "Test point" 235.204,240.03 r90 top
TP16 "" "Test point" 221.234,240.03 r90 top
TP17 "" "Test point" 193.548,240.03 r90 top
TP18 "" "Test point" 179.578,240.03 r90 top
TP19 "" "Test point" 94.996,240.03 r90 top
TP20 "" "Test point" 102.108,240.03 r90 top
TP21 "" "Test point" 109.474,240.03 r90 top
TP22 "" "Test point" 116.332,240.03 r90 top
U1 "TPS259470ARPWR" VQFN-HR-10 327.914,197.231 r0 top
U2 "TPS5430DDAR" CONV_TPS5430DDAR 259.588,195.834 r0 top
U3 "MCP16502 QFN-32" QFN-32_5X5_EP3.7X3.7 363.093,282.067 r0 top value=MCP16502TAB-E/S8B
U4 "Microchip PAC1934 UQFN-16" UQFN-16_4X4_EP2.6X2.6 292.608,282.194 r0 top value=PAC1934
U5 "SAMA7D65" TFBGA-343_14x14 745.109,264.922 r0 top value=SAMA7D65-V/4HB-SL3
U6 "IS43TR16512BL-125KBLI" TWBGA96_ISI 493.649,232.029 r0 top
U7 "MTFC32GAZAQDW-AAT" BGA_100_C_100P_10X17_1400X1800X150 262.255,158.115 r0 top
U8 "MTFC32GAZAQDW-AAT" BGA_100_C_100P_10X17_1400X1800X150 109.855,158.115 r0 top
U9 "AS3004204-0108X0PSAY" SOIC127P790X216-8N 97.282,139.065 r90 top
U10 "473460001" 47346-0001_MOL 47.636,4.256 r0 top
U11 "TC1047AVNBTR" SOT-23_MC_MCH 171.069,312.928 r0 top
U12 "TC1047AVNBTR" SOT-23_MC_MCH 144.399,312.928 r0 top
U13 "TC1047AVNBTR" SOT-23_MC_MCH 117.221,312.928 r0 top
U14 "RV-3129-C3-32.768KHZ-OPTION-A-TB-QA" IC_RV-3129-C3-32.768KHZ-OPTION-A-TB-QA 118.745,218.059 r0 top
U15 "TPL5010DDCR" TPL5010DDCR 145.796,333.502 r0 top
U16 "DS90LV011AQ-Q1" DS90LV011AQ-Q1 198.12,179.832 r0 top
U17 "DS90LV011AQ-Q1" DS90LV011AQ-Q1 171.196,179.832 r0 top
U18 "DS90LT012AQ-Q1" DS90LV011AQ-Q1 144.272,179.832 r0 top
U19 "DS90LT012AQ-Q1" DS90LV011AQ-Q1 117.348,179.832 r0 top
U20 "SN65HVD230DR" SOIC127P599X175-8N 227.711,17.018 r0 top
U21 "SN65HVD230DR" SOIC127P599X175-8N 148.336,17.018 r0 top
U22 "LTC2865HMSE#TRPBF" MSOP-12_MSE_LIT 133.985,209.423 r0 top
U23 "FSUSB74MPX" QFN50P300X300X80-17N 111.252,323.596 r90 top
VR1 "LM1117MP-3.3/NOPB" VREG_LM1117MP-3.3/NOPB 152.527,195.072 r0 top
VR2 "LM1117MP-3.3/NOPB" VREG_LM1117MP-3.3/NOPB 162.814,195.072 r0 top
Y1 "Crystal 4 Pins" XTAL_ECS2401037B2JTNTR 123.063,246.507 r0 top value=24MHz
Y2 "Crystal 2 Pins" CRYSTAL_FC-12M_L2.05W1.2H0.6 118.745,246.507 r0 top value="32.768 kHz"

## Footprints (in the part's own frame and the unit in brackets; to place one, negate y for a bottom-side part, rotate by r counter-clockwise, add the part's x,y. Pads: shape width x height; smd on the part's side, far side on the other; paste and mask are expansions set on the pad)
47346-0001_MOL [mil]
  rect 18x54 smd paste+0 mask+0: 1(-51.18,101.58) 2(-25.59,101.58) 3(0,101.58) 4(25.59,101.58) 5(51.18,101.58)
  rect 56x61 smd paste+0 mask+0: 6(-97.93,98.24) 7(97.93,98.24)
  rect 65x51 smd paste+0 mask+0: 8(-132.87,-3.14) 9(132.87,-3.14)
  rect 71x75 smd paste+0 mask+0: 10(-45.28,-3.14)
  rect 39x75 smd paste+0 mask+0: 11(61,-3.14)
  silkscreen extent -117,-118 117,159, body extent -157,-109 157,104, height 106
5040500591 [mil]
  rect 26x41 smd: 1(118.11,-119.76) 2(59.06,-119.76) 3(0,-119.76) 4(-59.06,-119.76) 5(-118.11,-119.76)
  rect 51x73 smd: 6(-208.86,84.57) 6(208.86,84.57)
  silkscreen extent -226,-173 226,125, body extent -237,-134 237,120, height 79
5040500691 [mil]
  rect 26x41 smd paste+0: 1(147.64,-119.76) 2(88.58,-119.76) 3(29.53,-119.76) 4(-29.53,-119.76) 5(-88.58,-119.76) 6(-147.64,-119.76)
  rect 51x73 smd: 7(-238.19,84.57) 7(238.19,84.57)
  silkscreen extent -256,-173 256,125, body extent -267,-128 267,126, height 79
5040500991 [mil]
  rect 26x41 smd: 1(236.22,-119.76) 2(177.17,-119.76) 3(118.11,-119.76) 4(59.06,-119.76) 5(0,-119.76) 6(-59.06,-119.76) 7(-118.11,-119.76) 8(-177.17,-119.76) 9(-236.22,-119.76)
  rect 51x73 smd: M1(326.97,84.57) M2(-326.97,84.57)
  silkscreen extent -344,-173 344,126, body extent -354,-129 357,124, height 79
BGA_100_C_100P_10X17_1400X1800X150 [mm] "BGA, 100-Leads, Body 14.00x18.00mmx1.50mm, Pitch 1.00mm"
  round 0.49 smd: A1(-4.5,8) A2(-3.5,8) A9(3.5,8) A10(4.5,8) B1(-4.5,7) B10(4.5,7) D2(-3.5,5) D3(-2.5,5) D4(-1.5,5) D5(-0.5,5) D6(0.5,5) D7(1.5,5) D8(2.5,5) D9(3.5,5) E2(-3.5,4) E3(-2.5,4) E4(-1.5,4) E5(-0.5,4) E6(0.5,4) E7(1.5,4) E8(2.5,4) E9(3.5,4) F2(-3.5,3) F3(-2.5,3) F4(-1.5,3) F5(-0.5,3) F6(0.5,3) F7(1.5,3) F8(2.5,3) F9(3.5,3) G2(-3.5,2) G3(-2.5,2) G4(-1.5,2) G5(-0.5,2) G6(0.5,2) G7(1.5,2) G8(2.5,2) G9(3.5,2) H2(-3.5,1) H3(-2.5,1) H4(-1.5,1) H5(-0.5,1) H6(0.5,1) H7(1.5,1) H8(2.5,1) H9(3.5,1) J2(-3.5,0) J3(-2.5,0) J4(-1.5,0) J5(-0.5,0) J6(0.5,0) J7(1.5,0) J8(2.5,0) J9(3.5,0) K2(-3.5,-1) K3(-2.5,-1) K4(-1.5,-1) K5(-0.5,-1) K6(0.5,-1) K7(1.5,-1) K8(2.5,-1) K9(3.5,-1) L2(-3.5,-2) L3(-2.5,-2) L4(-1.5,-2) L5(-0.5,-2) L6(0.5,-2) L7(1.5,-2) L8(2.5,-2) L9(3.5,-2) M2(-3.5,-3) M3(-2.5,-3) M4(-1.5,-3) M5(-0.5,-3) M6(0.5,-3) M7(1.5,-3) M8(2.5,-3) M9(3.5,-3) N2(-3.5,-4) N3(-2.5,-4) N4(-1.5,-4) N5(-0.5,-4) N6(0.5,-4) N7(1.5,-4) N8(2.5,-4) N9(3.5,-4) P2(-3.5,-5) P3(-2.5,-5) P4(-1.5,-5) P5(-0.5,-5) P6(0.5,-5) P7(1.5,-5) P8(2.5,-5) P9(3.5,-5) T1(-4.5,-7) T10(4.5,-7) U1(-4.5,-8) U2(-3.5,-8) U9(3.5,-8) U10(4.5,-8)
  round 0.35 on Mech8 paste+0 mask+0: A1(-4.5,8) A2(-3.5,8) A9(3.5,8) A10(4.5,8) B1(-4.5,7) B10(4.5,7) D2(-3.5,5) D3(-2.5,5) D4(-1.5,5) D5(-0.5,5) D6(0.5,5) D7(1.5,5) D8(2.5,5) D9(3.5,5) E2(-3.5,4) E3(-2.5,4) E4(-1.5,4) E5(-0.5,4) E6(0.5,4) E7(1.5,4) E8(2.5,4) E9(3.5,4) F2(-3.5,3) F3(-2.5,3) F4(-1.5,3) F5(-0.5,3) F6(0.5,3) F7(1.5,3) F8(2.5,3) F9(3.5,3) G2(-3.5,2) G3(-2.5,2) G4(-1.5,2) G5(-0.5,2) G6(0.5,2) G7(1.5,2) G8(2.5,2) G9(3.5,2) H2(-3.5,1) H3(-2.5,1) H4(-1.5,1) H5(-0.5,1) H6(0.5,1) H7(1.5,1) H8(2.5,1) H9(3.5,1) J2(-3.5,0) J3(-2.5,0) J4(-1.5,0) J5(-0.5,0) J6(0.5,0) J7(1.5,0) J8(2.5,0) J9(3.5,0) K2(-3.5,-1) K3(-2.5,-1) K4(-1.5,-1) K5(-0.5,-1) K6(0.5,-1) K7(1.5,-1) K8(2.5,-1) K9(3.5,-1) L2(-3.5,-2) L3(-2.5,-2) L4(-1.5,-2) L5(-0.5,-2) L6(0.5,-2) L7(1.5,-2) L8(2.5,-2) L9(3.5,-2) M2(-3.5,-3) M3(-2.5,-3) M4(-1.5,-3) M5(-0.5,-3) M6(0.5,-3) M7(1.5,-3) M8(2.5,-3) M9(3.5,-3) N2(-3.5,-4) N3(-2.5,-4) N4(-1.5,-4) N5(-0.5,-4) N6(0.5,-4) N7(1.5,-4) N8(2.5,-4) N9(3.5,-4) P2(-3.5,-5) P3(-2.5,-5) P4(-1.5,-5) P5(-0.5,-5) P6(0.5,-5) P7(1.5,-5) P8(2.5,-5) P9(3.5,-5) T1(-4.5,-7) T10(4.5,-7) U1(-4.5,-8) U2(-3.5,-8) U9(3.5,-8) U10(4.5,-8)
  silkscreen extent -7.77,-9 7,9, body extent -7,-9 7,9, height 1.5
CAP_C_0603x30 [mm] "Chip Capacitor, 2-Leads, Body 0.6x0.3mm, IPC Medium Density"
  rrect50% 0.275x0.3 smd mask+0.05: 1(-0.262,0) 2(0.262,0)
  body extent -0.3,-0.15 0.3,0.15, height 0.28
CAP_C_1005X50_L [mm] "Chip Capacitor, 2-Leads, Body 1.0x0.5mm, IPC High Density"
  rrect50% 0.55x0.6 smd mask+0.05: 1(-0.45,0) 2(0.45,0)
  body extent -0.5,-0.3 0.5,0.3, height 0.2
CAP_C_1608X80 [mm] "Chip Capacitor, 2-Leads, Body 1.60x0.80mm, IPC Medium Density"
  rrect50% 0.8x0.9 smd: 1(-0.8,0) 2(0.8,0)
  silkscreen extent -0.9,-0.7 0.9,0.7, body extent -0.87,-0.48 0.87,0.48, height 0.85
CAP_C_2012X110 [mm] "Chip Capacitor, 2-Leads, Body 2.00x1.25mm, IPC High Density"
  rrect41% 1.2x1.3 smd: 1(-0.9,0) 2(0.9,0)
  silkscreen extent -1.1,-0.9 1.1,0.9, body extent -1.1,-0.72 1.1,0.72, height 1.1
CAP_C_3225X80 [mm] "Chip Capacitor, 2-Leads, Body 3.20x2.50mm, IPC Medium Density"
  rrect38% 1.3x2.7 smd: 1(-1.4,0) 2(1.4,0)
  silkscreen extent -0.6,-1.35 0.6,1.35, body extent -1.7,-1.35 1.7,1.35, height 0.75
CONV_TPS5430DDAR [mm] "IC REG BUCK ADJ 3A 8SOPWR"
  rrect10% 1.55x0.6 smd mask+0: 1(-2.7,1.905) 2(-2.7,0.635) 3(-2.7,-0.635) 4(-2.7,-1.905) 5(2.7,-1.905) 6(2.7,-0.635) 7(2.7,0.635) 8(2.7,1.905)
  round 0.3 hole 0.2 mask+0: 6(-0.65,-1.95) 6(-0.65,-0.65) 6(-0.65,0.65) 6(-0.65,1.95) 6(0.65,-1.95) 6(0.65,-0.65) 6(0.65,0.65) 6(0.65,1.95)
  rect 2.95x4.9 smd paste+0: 9(0,0)
  silkscreen extent -4.17,-2.69 1.96,2.72, body extent -3,-2.45 3,2.45, height 1.7
CRYSTAL_FC-12M_L2.05W1.2H0.6 [mm] "CRYSTAL 32.768KHZ 12.5PF SMD"
  rect 0.7x1.4 smd mask+0: 1(-0.75,0) 2(0.75,0)
  silkscreen extent -1.4,-1 1.4,1, body extent -1.02,-0.6 1.03,0.6, height 0.6
DIODE_SOT457_1P7X3P1_NEX [mil]
  rect 43.5x18 smd paste+0 mask+0: 1(-51.25,37.4) 2(-51.25,0) 3(-51.25,-37.4) 4(51.25,-37.4) 5(51.25,0) 6(51.25,37.4)
  silkscreen extent -95,-62 34,62, body extent -59,-57 59,57, height 43
DO-214AC_SMA [mm] "Molded Diode, 2-Leads, Body 5.20x2.61mm, IPC Medium Density"
  rrect30% 2.55x1.65 smd: 1(-2.05,0) 2(2.05,0)
  silkscreen extent -3.6,-1.5 2.8,1.5, body extent -2.6,-1.3 2.6,1.3, height 2.4
DS90LV011AQ-Q1 [mm]
  rrect50% 1.21x0.59 smd: 1(-1.255,0.95) 2(-1.255,0) 3(-1.255,-0.95) 4(1.255,-0.95) 5(1.255,0.95)
  silkscreen extent -1.45,-1.45 0.8,1.88, body extent -1.4,-1.45 1.4,1.45, height 1.45
Header_254P_8x1 [mm]
  rect 1.6x1.6 hole 1.1: 1(-8.89,0)
  round 1.6 hole 1.1: 2(-6.35,0) 3(-3.81,0) 4(-1.27,0) 5(1.27,0) 6(3.81,0) 7(6.35,0) 8(8.89,0)
  silkscreen extent -10.16,-1.27 10.16,1.27
HOLE_SPACE [mm]
  round 1 hole 0.5: 1(-2.325,0) 1(-1.644,-1.644) 1(-1.644,1.644) 1(0,2.325) 1(0,-2.286) 1(1.644,-1.644) 1(1.644,1.644) 1(2.325,0)
  round 6 hole 3.3: 1(0,0)
IC_RV-3129-C3-32.768KHZ-OPTION-A-TB-QA [mm]
  rect 0.8x0.5 smd: 1(-1.1,1.6) 2(-1.1,0.8) 3(-1.1,0) 4(-1.1,-0.8) 5(-1.1,-1.6) 6(1.1,-1.6) 7(1.1,-0.8) 8(1.1,0) 9(1.1,0.8) 10(1.1,1.6)
  silkscreen extent -2.25,-1.85 0.38,1.85, body extent -1.25,-1.85 1.25,1.85, height 0.9
IND_C_1008 [mm]
  rect 0.9x2.4 smd mask+0.075: 1(-1,0) 2(1,0)
  silkscreen extent -0.25,-1.1 0.25,1.1, body extent -1.24,-1 1.26,1, height 1.2
JUMPER_254P_2X1_NOPLACE [mm]
  rect 1.6x1.6 hole 1.1: 1(-1.27,0)
  round 1.6 hole 1.1: 2(1.27,0)
  silkscreen extent -2.54,-1.27 2.54,1.27, body extent -2.54,-1.27 5.08,1.27, height 9.1
JUMPER_1608 [mil]
  round 1 smd: 1(30.51,0)
  round 1 smd paste-99999 mask+4: 2(-30,0)
  Top Layer region: 38.88,-18.7 13.56,-18.7 -5,0 13.56,18.7 38.88,18.7 42.08,18.06 44.79,16.25 46.61,13.54 47.24,10.33 47.24,10.33 47.24,-10.33 46.61,-13.54 44.79,-16.25 42.08,-18.06 38.88,-18.7
  Top Layer region: -14.86,-0.09 3.75,-18.7 -38.37,-18.7 -41.57,-18.06 -44.28,-16.25 -46.1,-13.54 -46.73,-10.33 -46.73,-10.33 -46.73,10.33 -46.1,13.54 -44.28,16.25 -41.57,18.06 -38.37,18.7 -38.37,18.7 3.93,18.7
  silkscreen extent -40,-27 41,27
LED_0402 [mm]
  rrect50% 0.65x0.6 smd mask+0.05: 1(-0.525,0) 2(0.525,0)
  silkscreen extent -1,-0.5 0.5,0.5, body extent -0.51,-0.25 0.51,0.25, height 0.45
MOLEX_0532610271 [mm]
  rect 0.8x1.6 smd mask+0.076: 1(-0.625,2.4) 2(0.625,2.4)
  rect 2.1x3 smd mask+0.076: M1(-3.175,-0.5) M2(3.175,-0.5)
  silkscreen extent -3.83,-2.6 3.83,3.6, body extent -3.83,-2.6 3.83,2.6, height 3.4
MOLEX_0532610471 [mm]
  rect 0.8x1.6 smd mask+0.076: 1(-1.875,2.4) 2(-0.625,2.4) 3(0.625,2.4) 4(1.875,2.4)
  rect 2.1x3 smd mask+0.076: M1(-4.425,-0.5) M2(4.425,-0.5)
  silkscreen extent -5.07,-2.6 5.07,3.4, body extent -5.07,-2.6 5.07,2.6, height 3.4
MOLEX_1051620001 [mil]
  rect 115x22 smd: 14(-84.45,146.35) 15(80.51,146.35)
  rect 41x43 smd: G1(209.65,17.02)
  rect 41x47 smd: G2(209.65,119.78) G3(-209.64,97.33)
  rect 41x94 smd: G4(-209.65,-28.06)
  rect 20x39 smd: P1(139.76,-138.49) P2(96.46,-138.49) P3(53.15,-138.49) P4(9.84,-138.49) P5(-33.46,-138.49) P6(-76.77,-138.49) P7(-120.08,-138.49) P8(-163.39,-138.49)
  rect 28x31 smd: P9(209.06,-32.98)
  silkscreen extent -228,-169 228,154, body extent -222,-485 226,150, height 59
MOLEX_5040500491 [mm]
  rect 0.6x1 smd mask+0.076: 1(2.25,-2.87) 2(0.75,-2.87) 3(-0.75,-2.87) 4(-2.25,-2.87)
  rect 1.25x1.8 smd mask+0.076: M1(4.855,2.32) M2(-4.855,2.32)
  silkscreen extent -5.28,-3.7 5.28,3.22, body extent -5.27,-3.2 5.28,3.24, height 2
MOLEX_5040500891 [mm]
  rect 0.6x1 smd mask+0.076: 1(5.25,-2.87) 2(3.75,-2.87) 3(2.25,-2.87) 4(0.75,-2.87) 5(-0.75,-2.87) 6(-2.25,-2.87) 7(-3.75,-2.87) 8(-5.25,-2.87)
  rect 1.25x1.8 smd mask+0.076: M1(7.855,2.32) M2(-7.855,2.32)
  silkscreen extent -8.27,-3.7 8.27,3.22, body extent -8.27,-3.2 8.27,3.24, height 2
MOLEX_5040500991 [mil]
  rect 26x41 smd paste+0 mask+0: 1(236.22,-119.76) 2(177.17,-119.76) 3(118.11,-119.76) 4(59.06,-119.76) 5(0,-119.76) 6(-59.06,-119.76) 7(-118.11,-119.76) 8(-177.17,-119.76) 9(-236.22,-119.76)
  rect 51x73 smd: M1(-326.97,84.57) M2(326.97,84.57)
  silkscreen extent -344,-150 344,125, body extent -355,-126 355,128, height 79
MSOP-12_MSE_LIT [mil]
  rect 52.5x17 smd paste+0 mask+0: 1(-87.25,64) 2(-87.25,38.4) 3(-87.25,12.8) 4(-87.25,-12.8) 5(-87.25,-38.4) 6(-87.25,-64) 7(87.25,-64) 8(87.25,-38.4) 9(87.25,-12.8) 10(87.25,12.8) 11(87.25,38.4) 12(87.25,64)
  rect 69x116 smd paste-57.5 mask+0: 13(0,0)
  silkscreen extent -138,-86 66,86, body extent -99,-81 99,81, height 43
QFN50P300X300X80-17N [mm]
  rrect7% 0.83x0.26 smd mask+0.04: 1(-1.47,0.75) 2(-1.47,0.25) 3(-1.47,-0.25) 4(-1.47,-0.75) 9(1.47,-0.75) 10(1.47,-0.25) 11(1.47,0.25) 12(1.47,0.75)
  rrect7% 0.26x0.83 smd mask+0.04: 5(-0.75,-1.47) 6(-0.25,-1.47) 7(0.25,-1.47) 8(0.75,-1.47) 13(0.75,1.47) 14(0.25,1.47) 15(-0.25,1.47) 16(-0.75,1.47)
  rect 1.7x1.7 smd paste-0.2 mask+0.04: 17(0,0)
  silkscreen extent -2.6,-1.58 1.58,1.58, body extent -1.5,-1.5 1.5,1.5, height 0.8
QFN-32_5X5_EP3.7X3.7 [mm] "QFN32_5MMwith ePAD"
  rrect50% 0.7x0.3 smd mask+0.04: 1(-2.5,1.75) 2(-2.5,1.25) 3(-2.5,0.75) 4(-2.5,0.25) 5(-2.5,-0.25) 6(-2.5,-0.75) 7(-2.5,-1.25) 8(-2.5,-1.75) 17(2.5,-1.75) 18(2.5,-1.25) 19(2.5,-0.75) 20(2.5,-0.25) 21(2.5,0.25) 22(2.5,0.75) 23(2.5,1.25) 24(2.5,1.75)
  rrect50% 0.3x0.7 smd mask+0.04: 9(-1.75,-2.5) 10(-1.25,-2.5) 11(-0.75,-2.5) 12(-0.25,-2.5) 13(0.25,-2.5) 14(0.75,-2.5) 15(1.25,-2.5) 16(1.75,-2.5) 25(1.75,2.5) 26(1.25,2.5) 27(0.75,2.5) 28(0.25,2.5) 29(-0.25,2.5) 30(-0.75,2.5) 31(-1.25,2.5) 32(-1.75,2.5)
  rect 3.7x3.7 smd mask+0.05: 33(0,0)
  silkscreen extent -2.65,-2.65 2.65,2.68, body extent -2.56,-2.56 2.56,2.56, height 1.01